# Altium PCB VIrtex_XC7vx690t_2ffg1927i_T_B.PcbDoc (part 1 of 5)
Units mm, origin at the board's own origin, x right, y up, seen from the top; angles counter-clockwise.
Board outline 230 x 148 mm, 12 copper layers (Top Layer 1, GND_IN_Layer, 1_V_IN_layer, 1.2_V_IN_layer, 1.8_V_IN_layer, 3.3_V_IN_layer, IN_Layer 6, IN_Layer 7, IN_Layer 8, IN_Layer 9, IN_Layer 10, Bottom Layer), stack 1.452 mm thick; 73 components, 655 nets, 2765 pads, 42 vias.
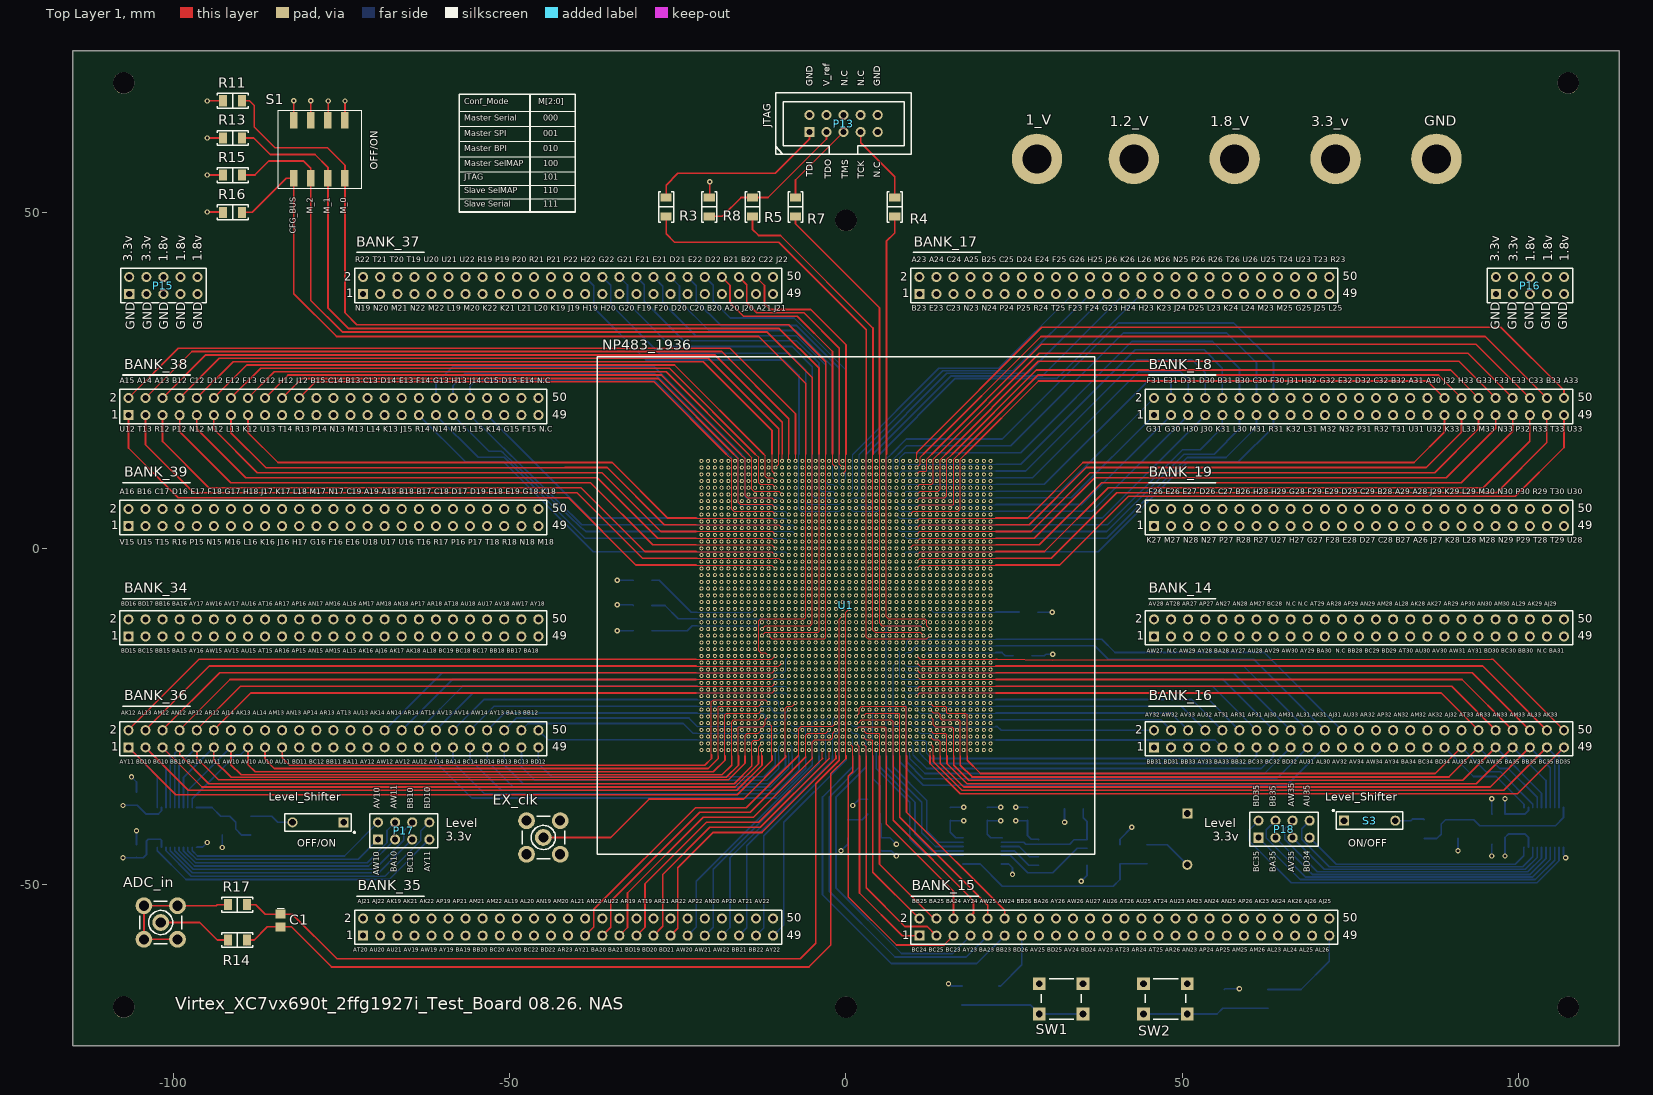
[diagram p0: Top Layer 1 view]
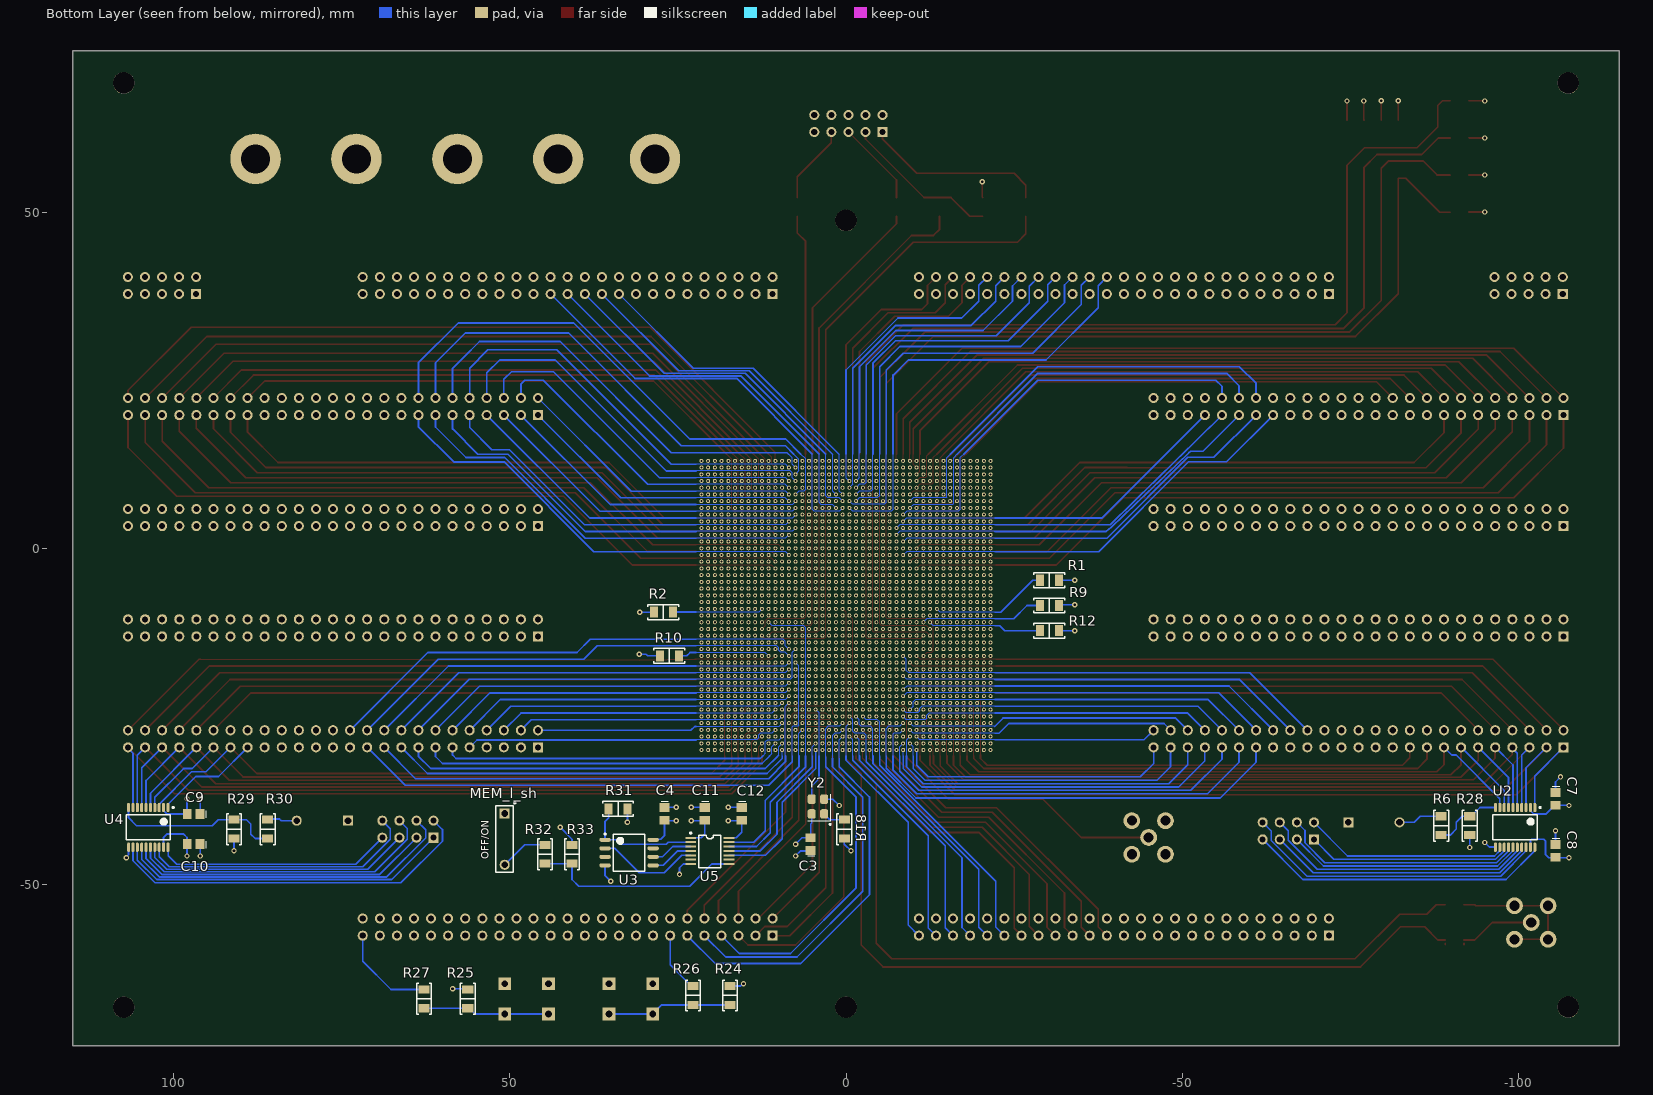
[diagram p1: Bottom Layer view, seen from below]
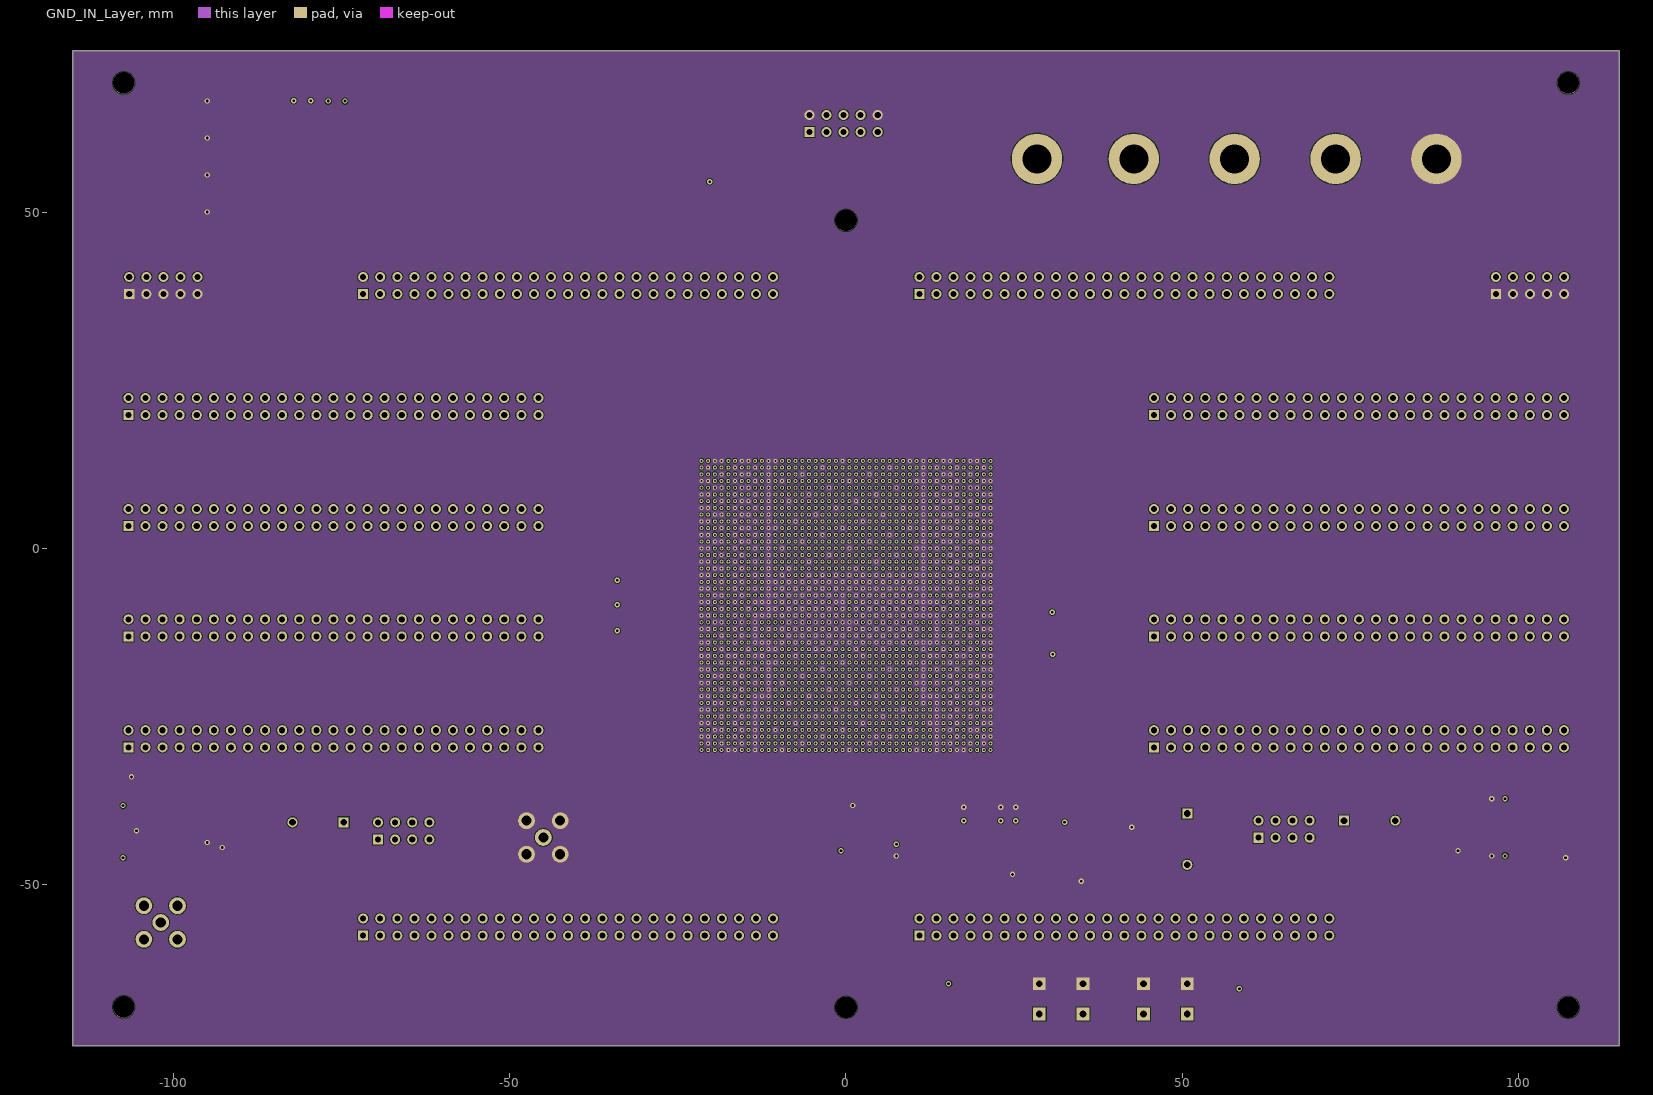
[diagram p2: GND_IN_Layer]
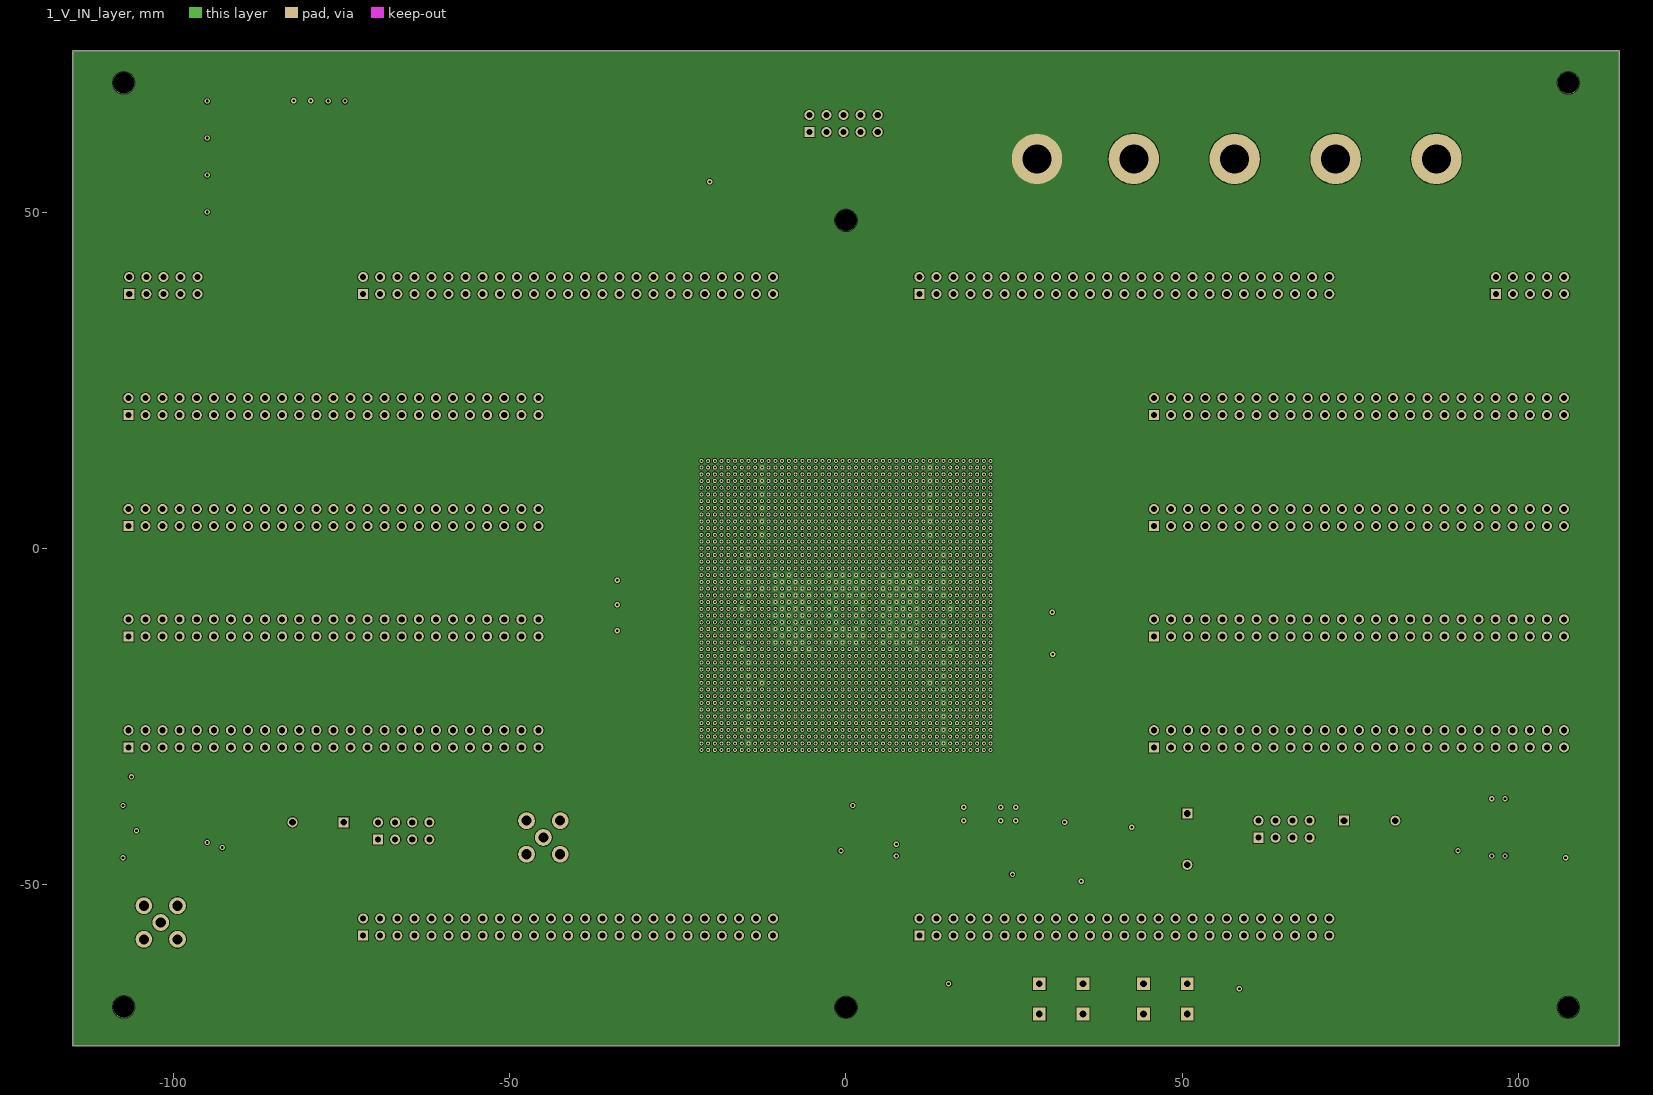
[diagram p3: 1_V_IN_layer]
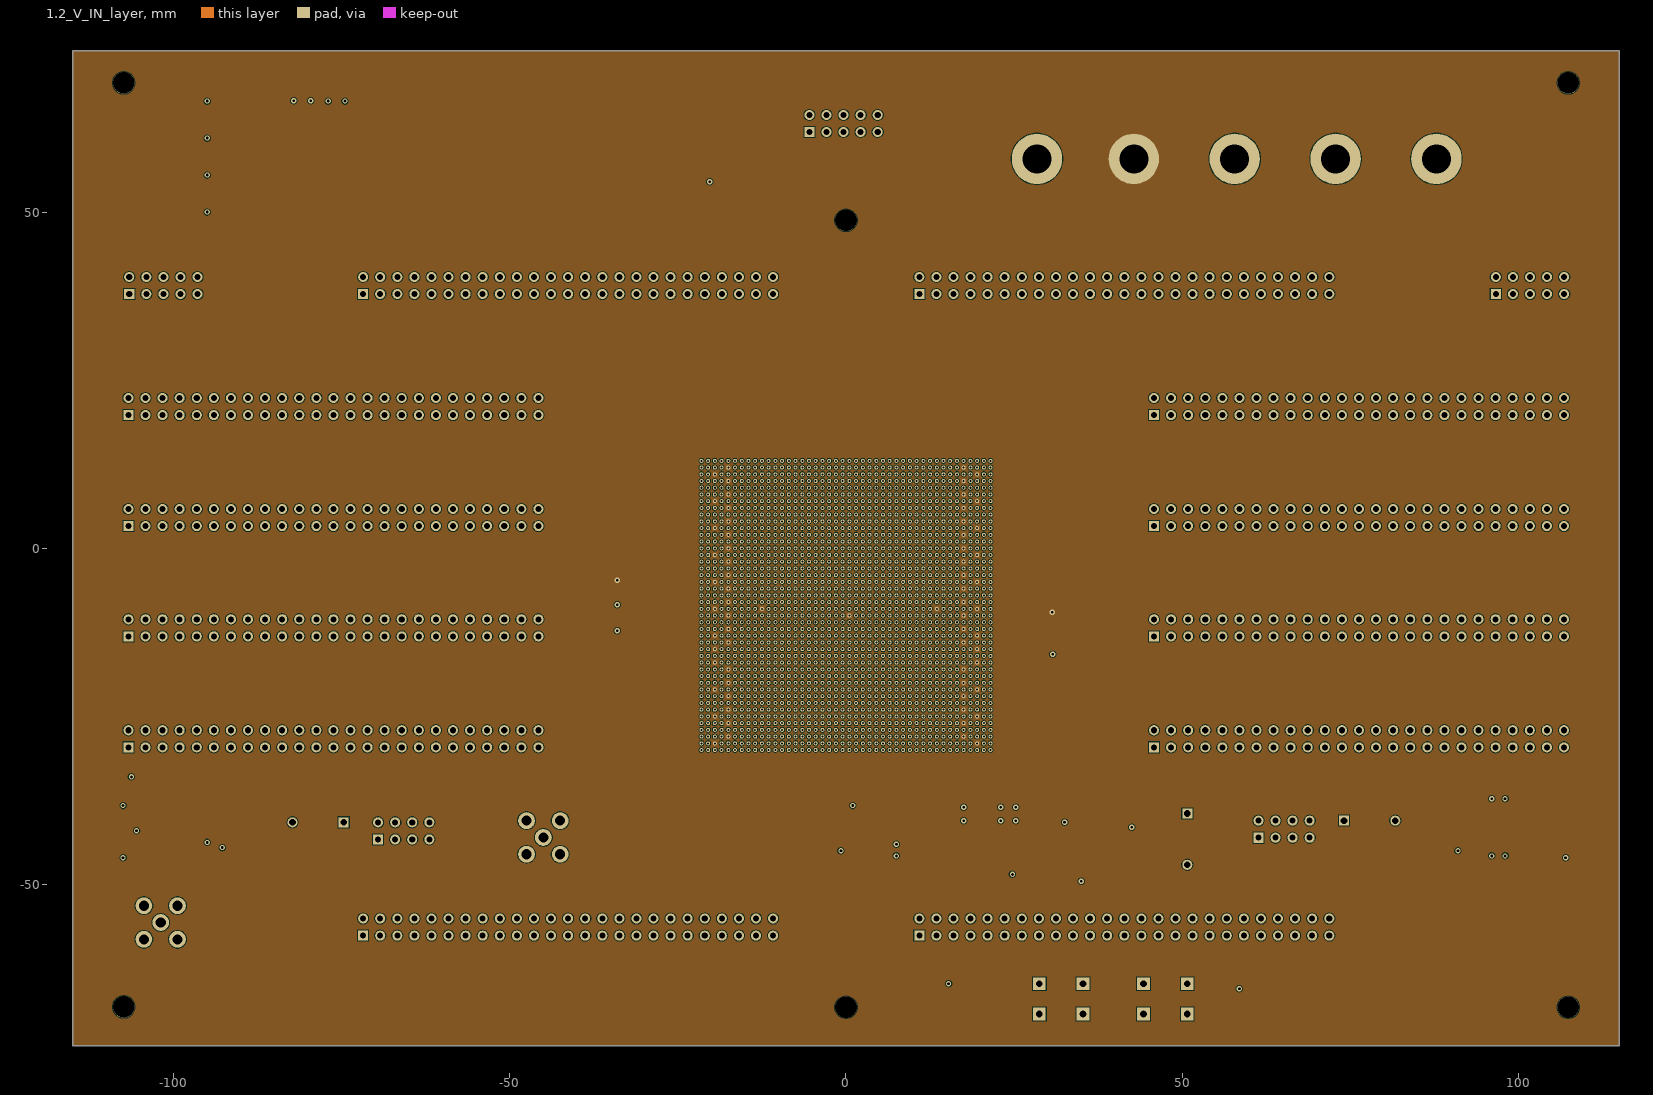
[diagram p4: 1.2_V_IN_layer]
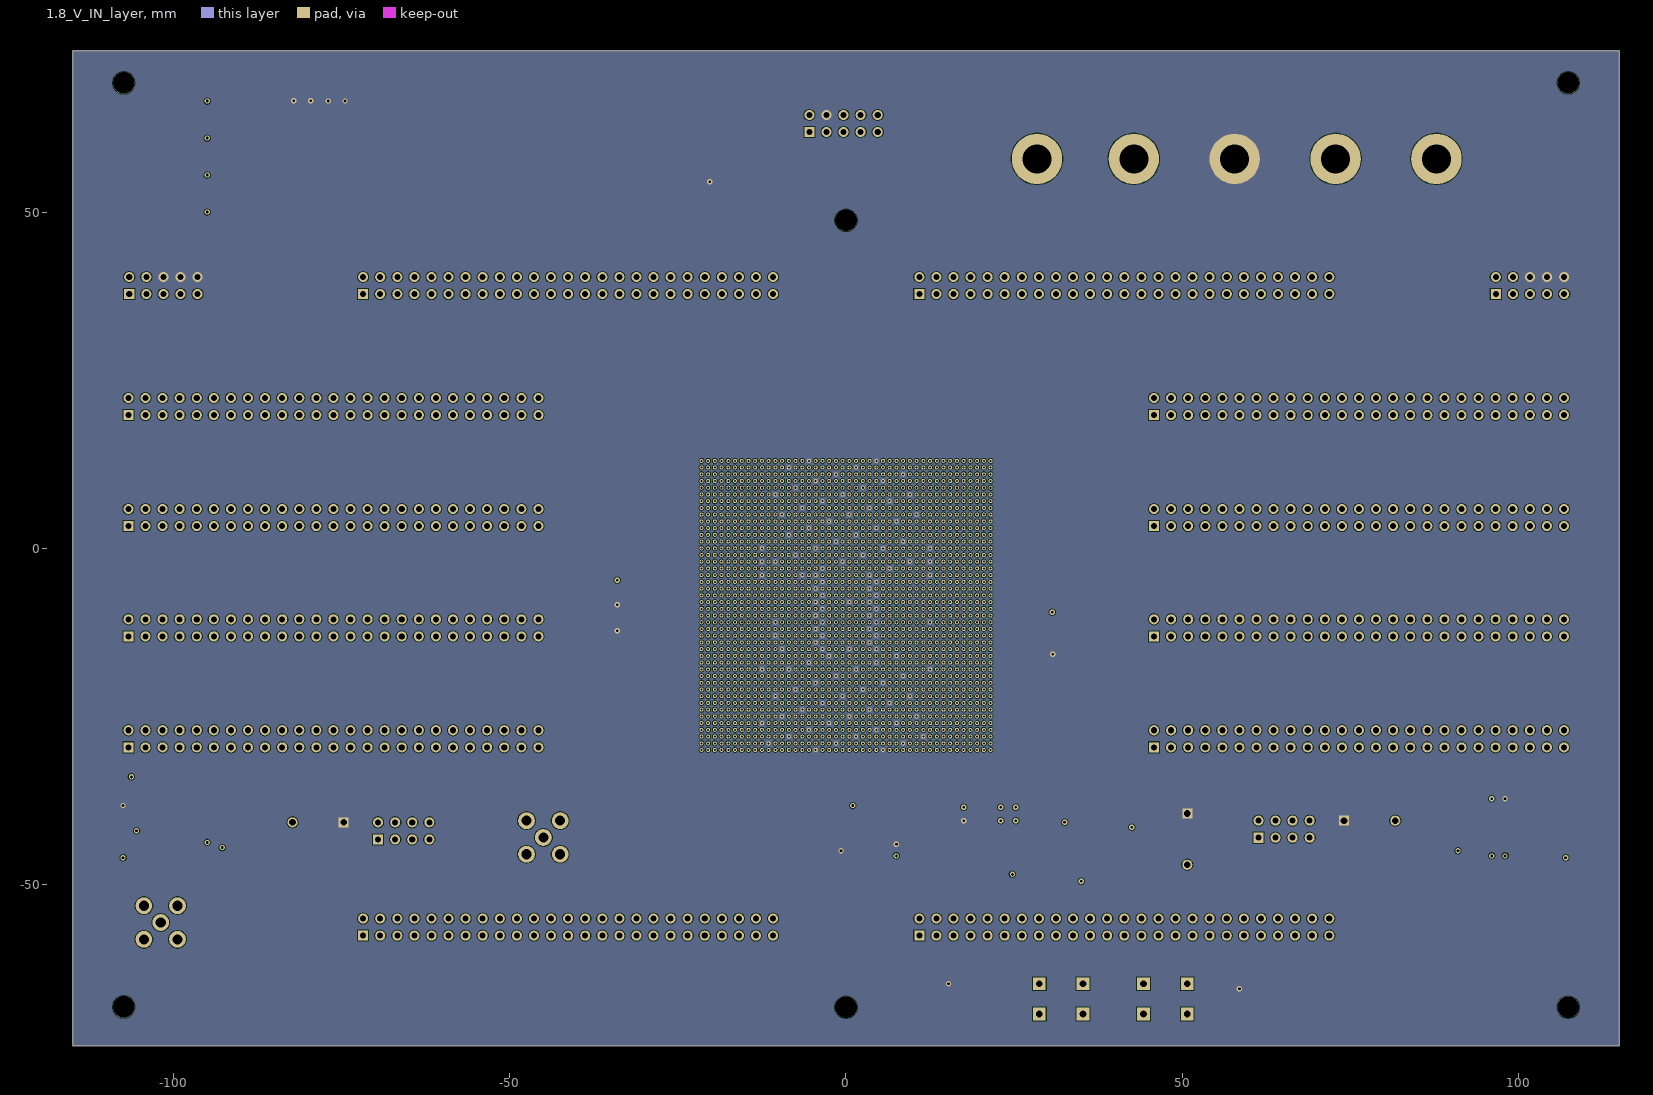
[diagram p5: 1.8_V_IN_layer]
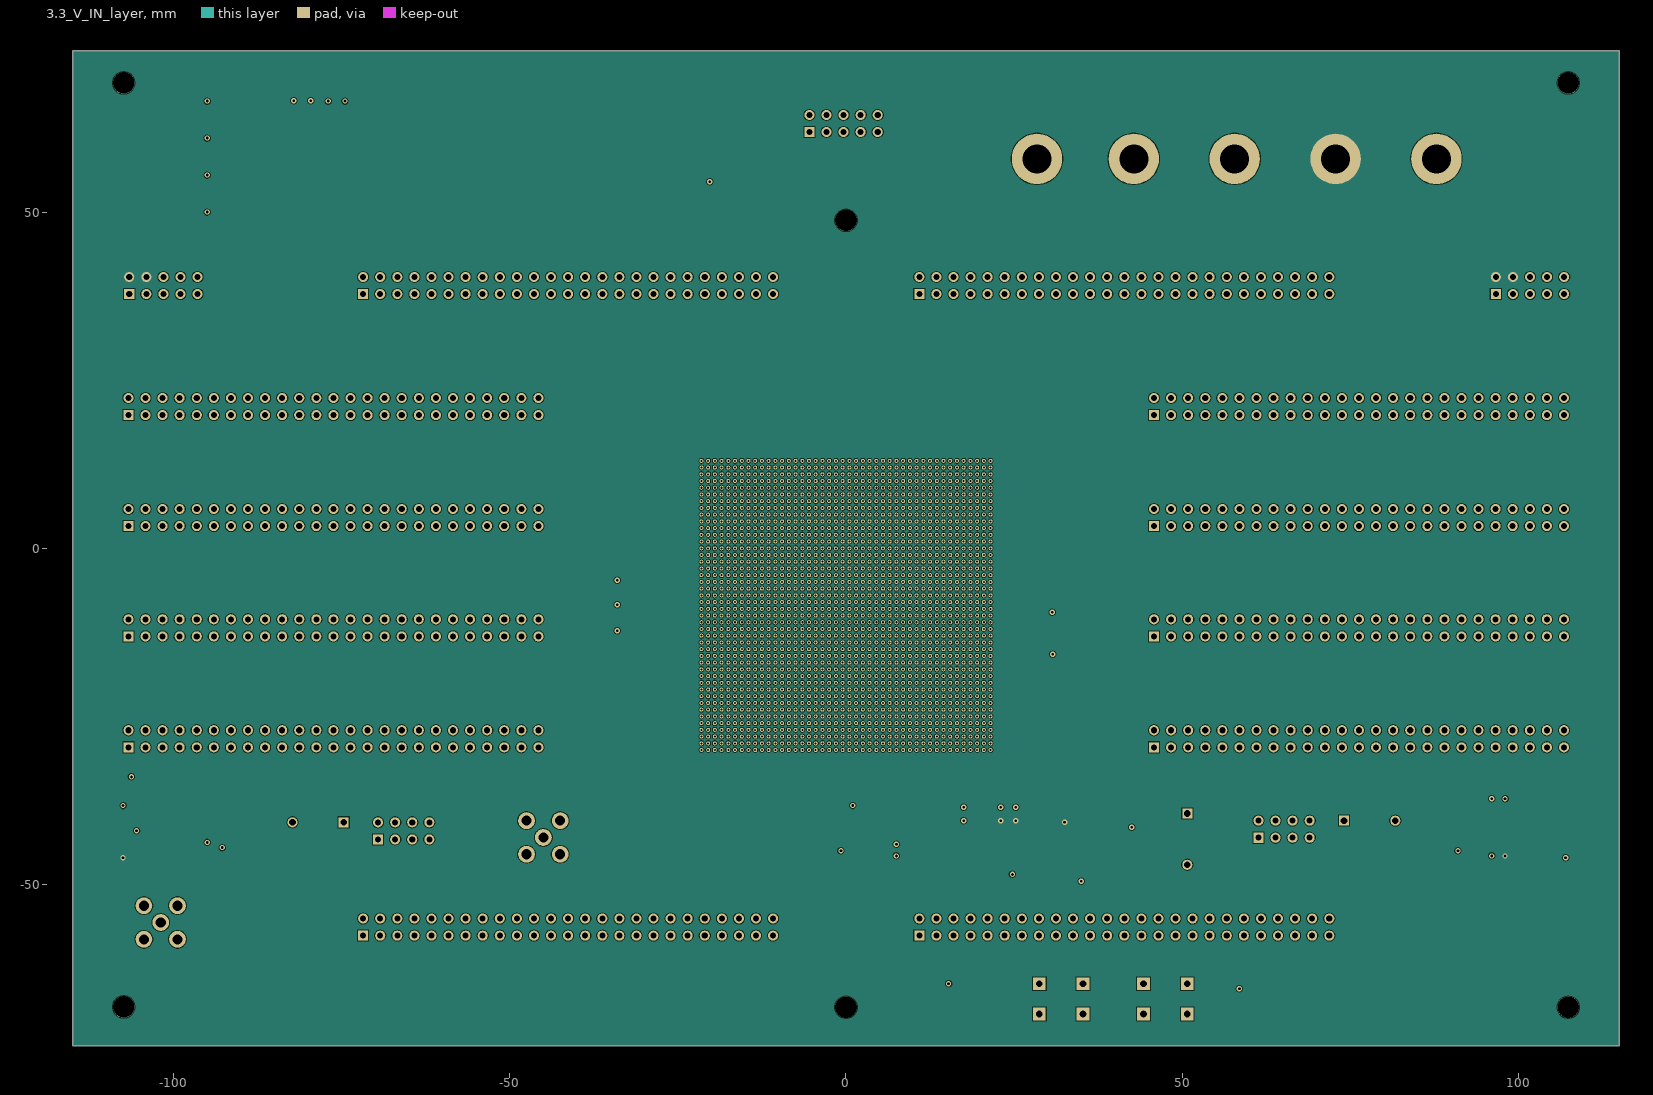
[diagram p6: 3.3_V_IN_layer]
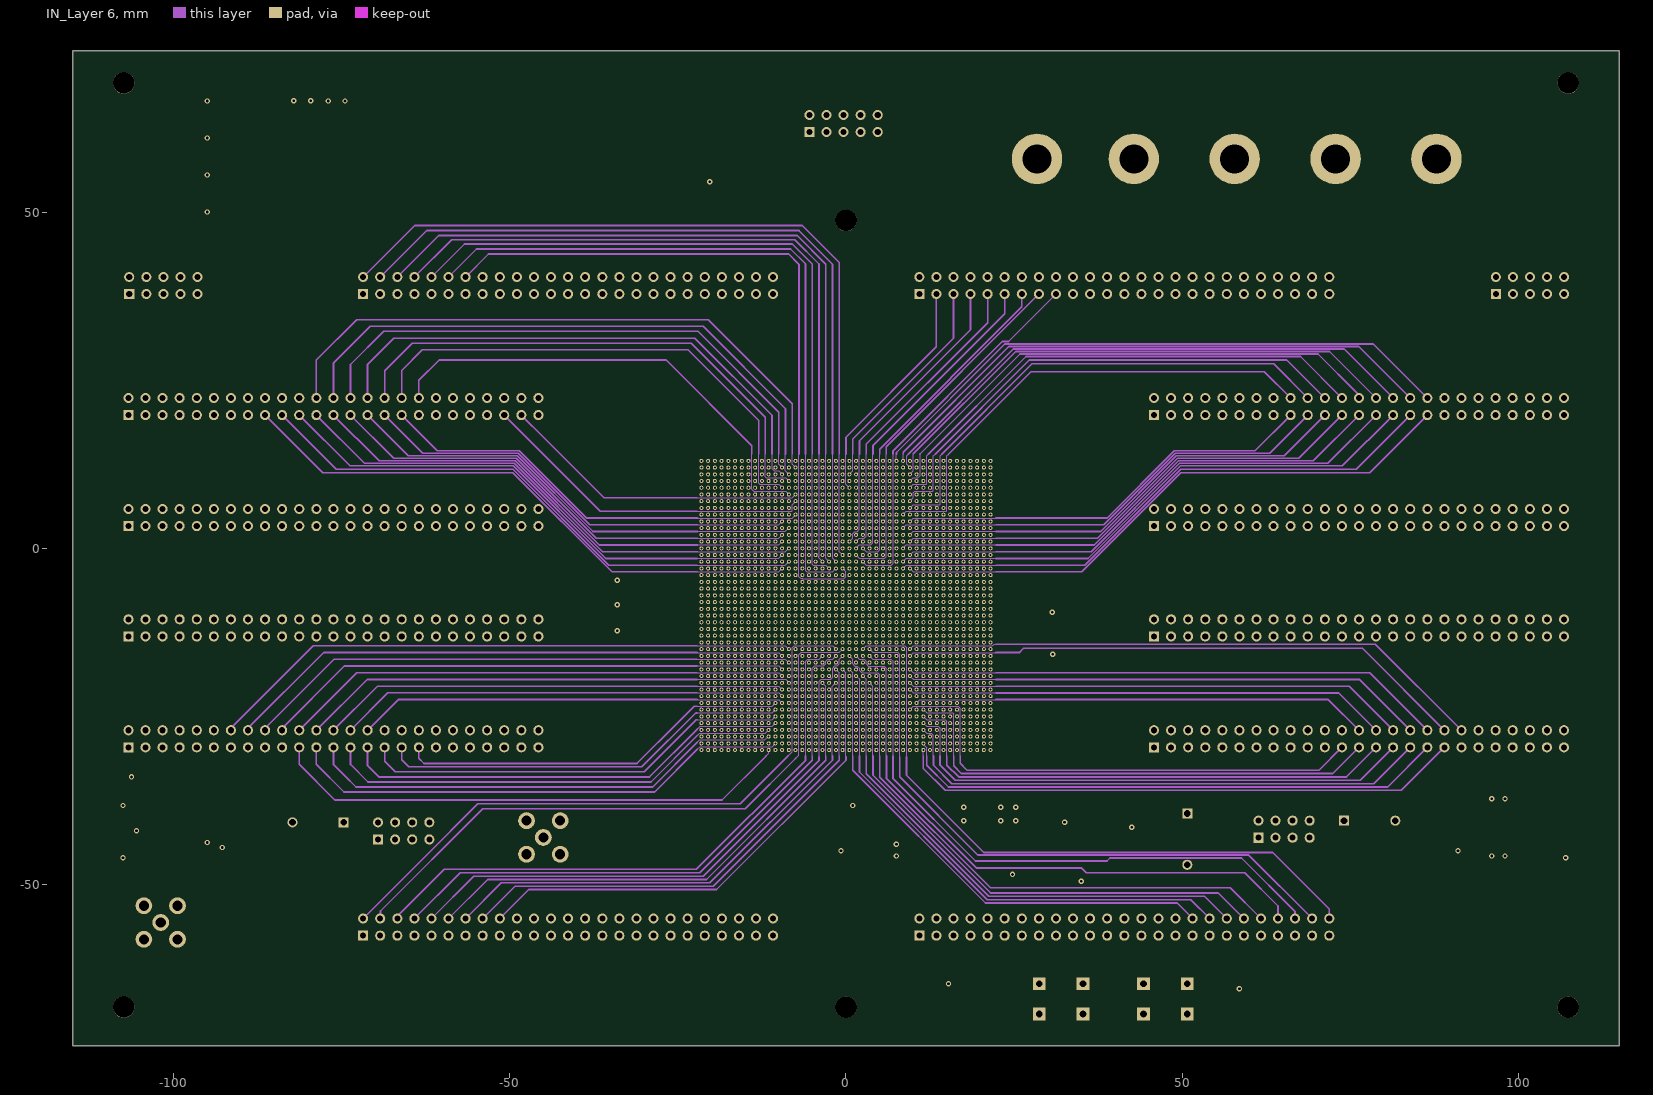
[diagram p7: IN_Layer 6]
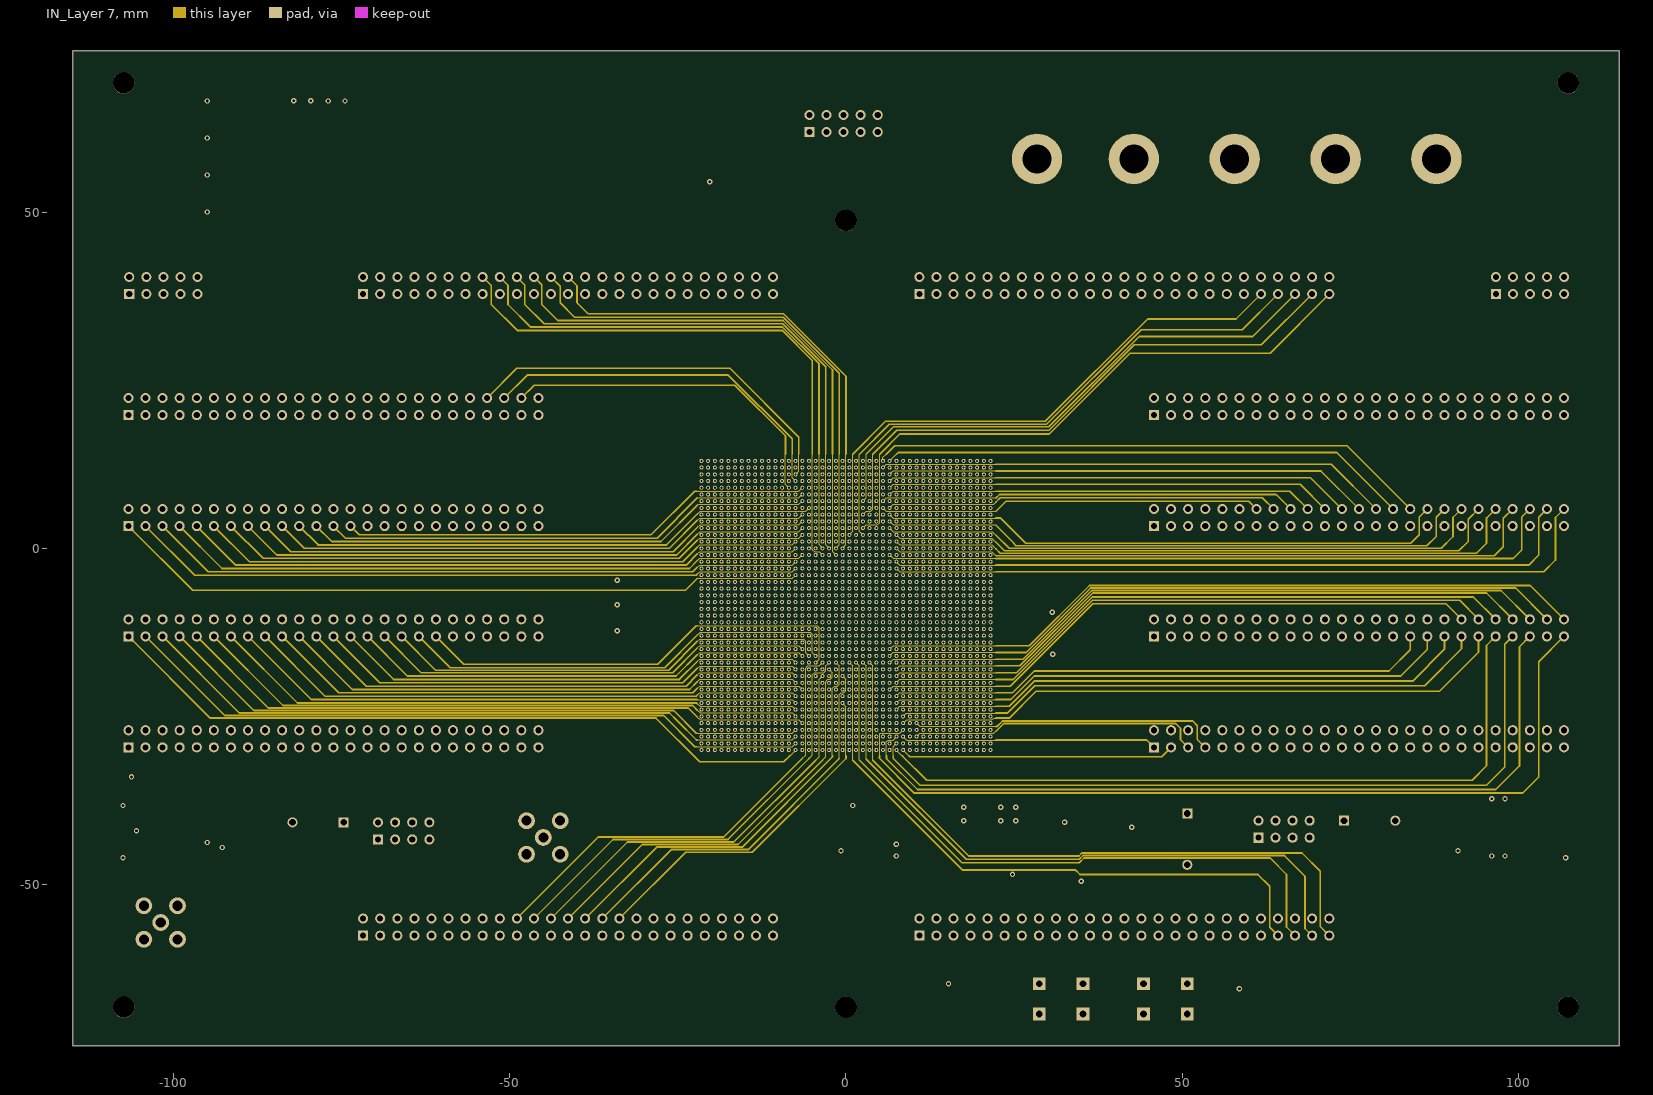
[diagram p8: IN_Layer 7]
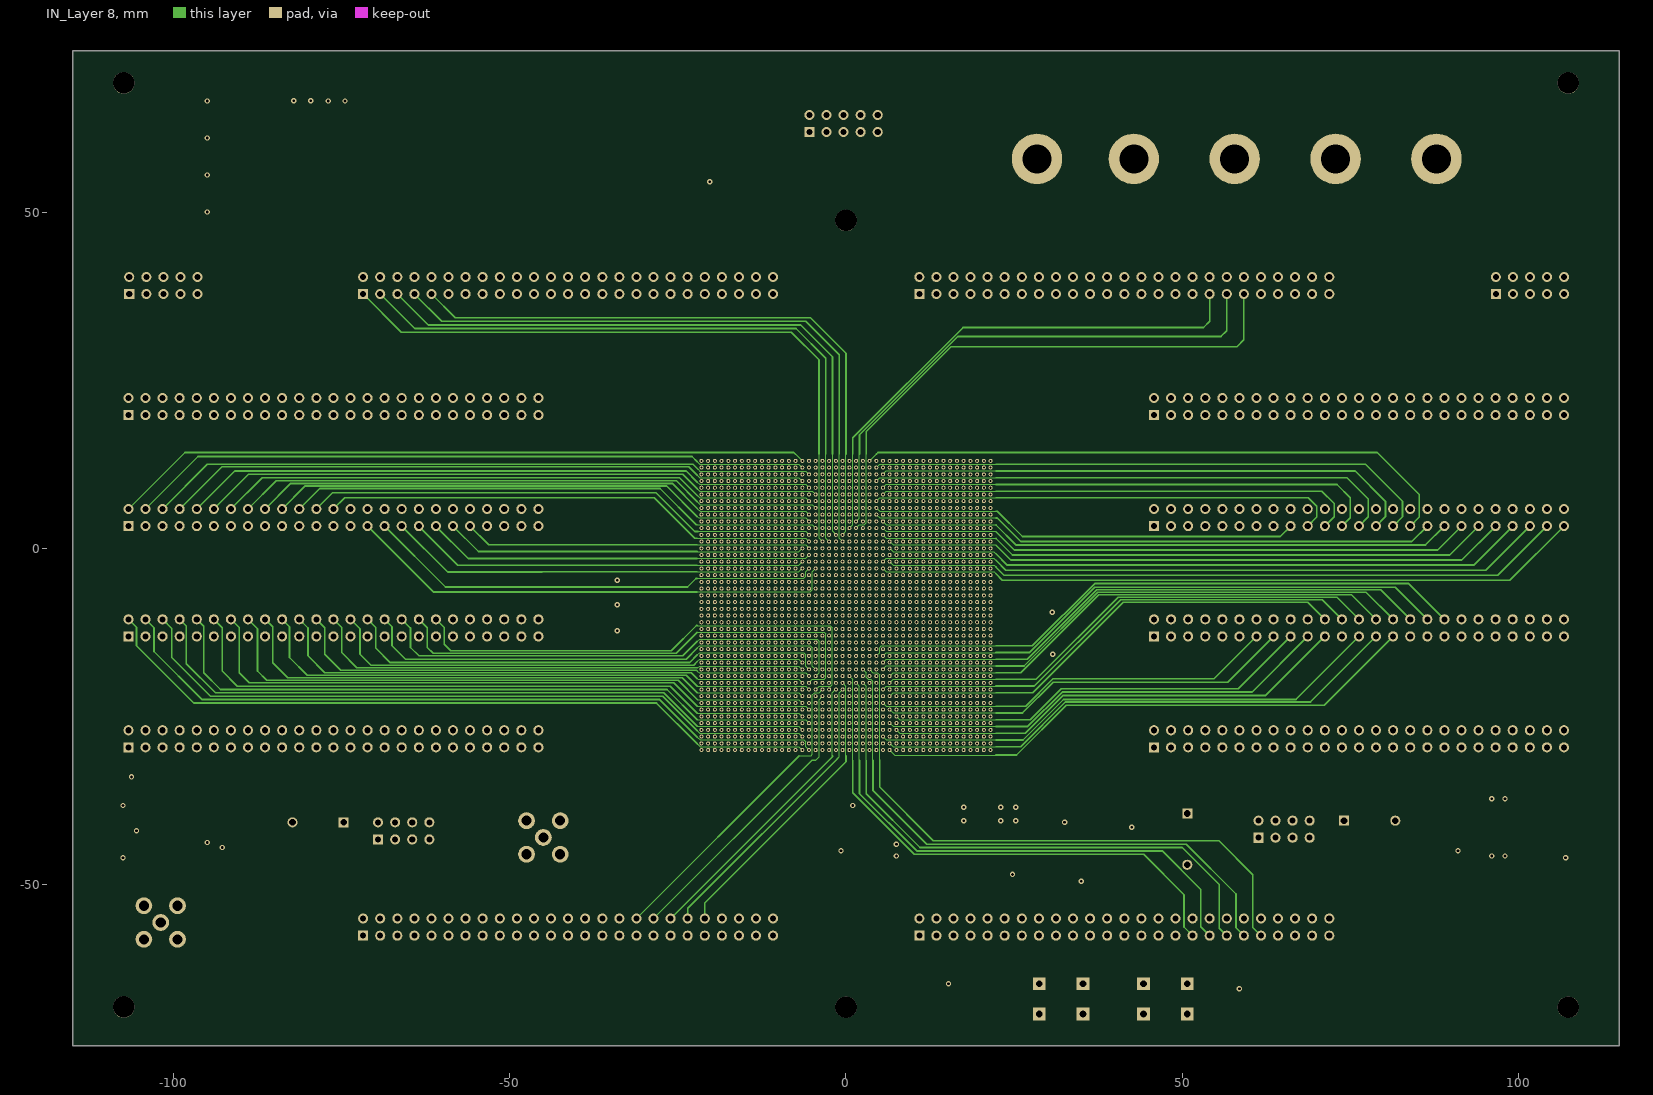
[diagram p9: IN_Layer 8]
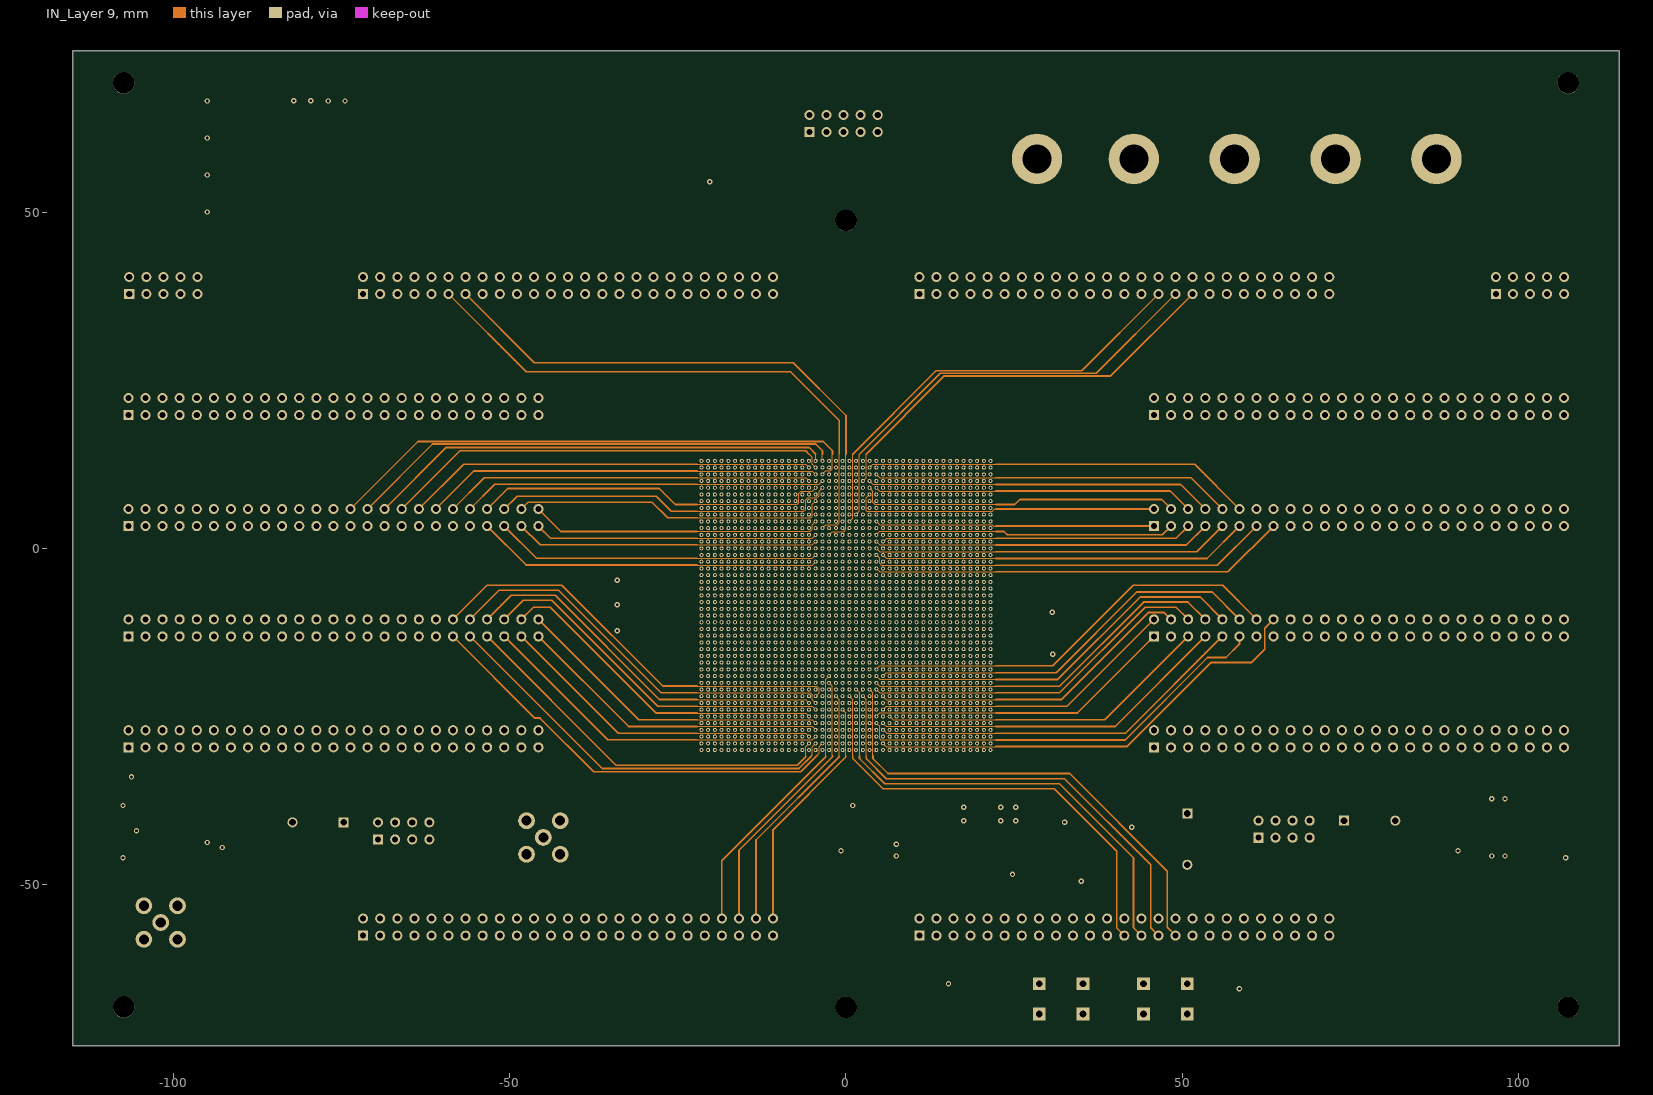
[diagram p10: IN_Layer 9]
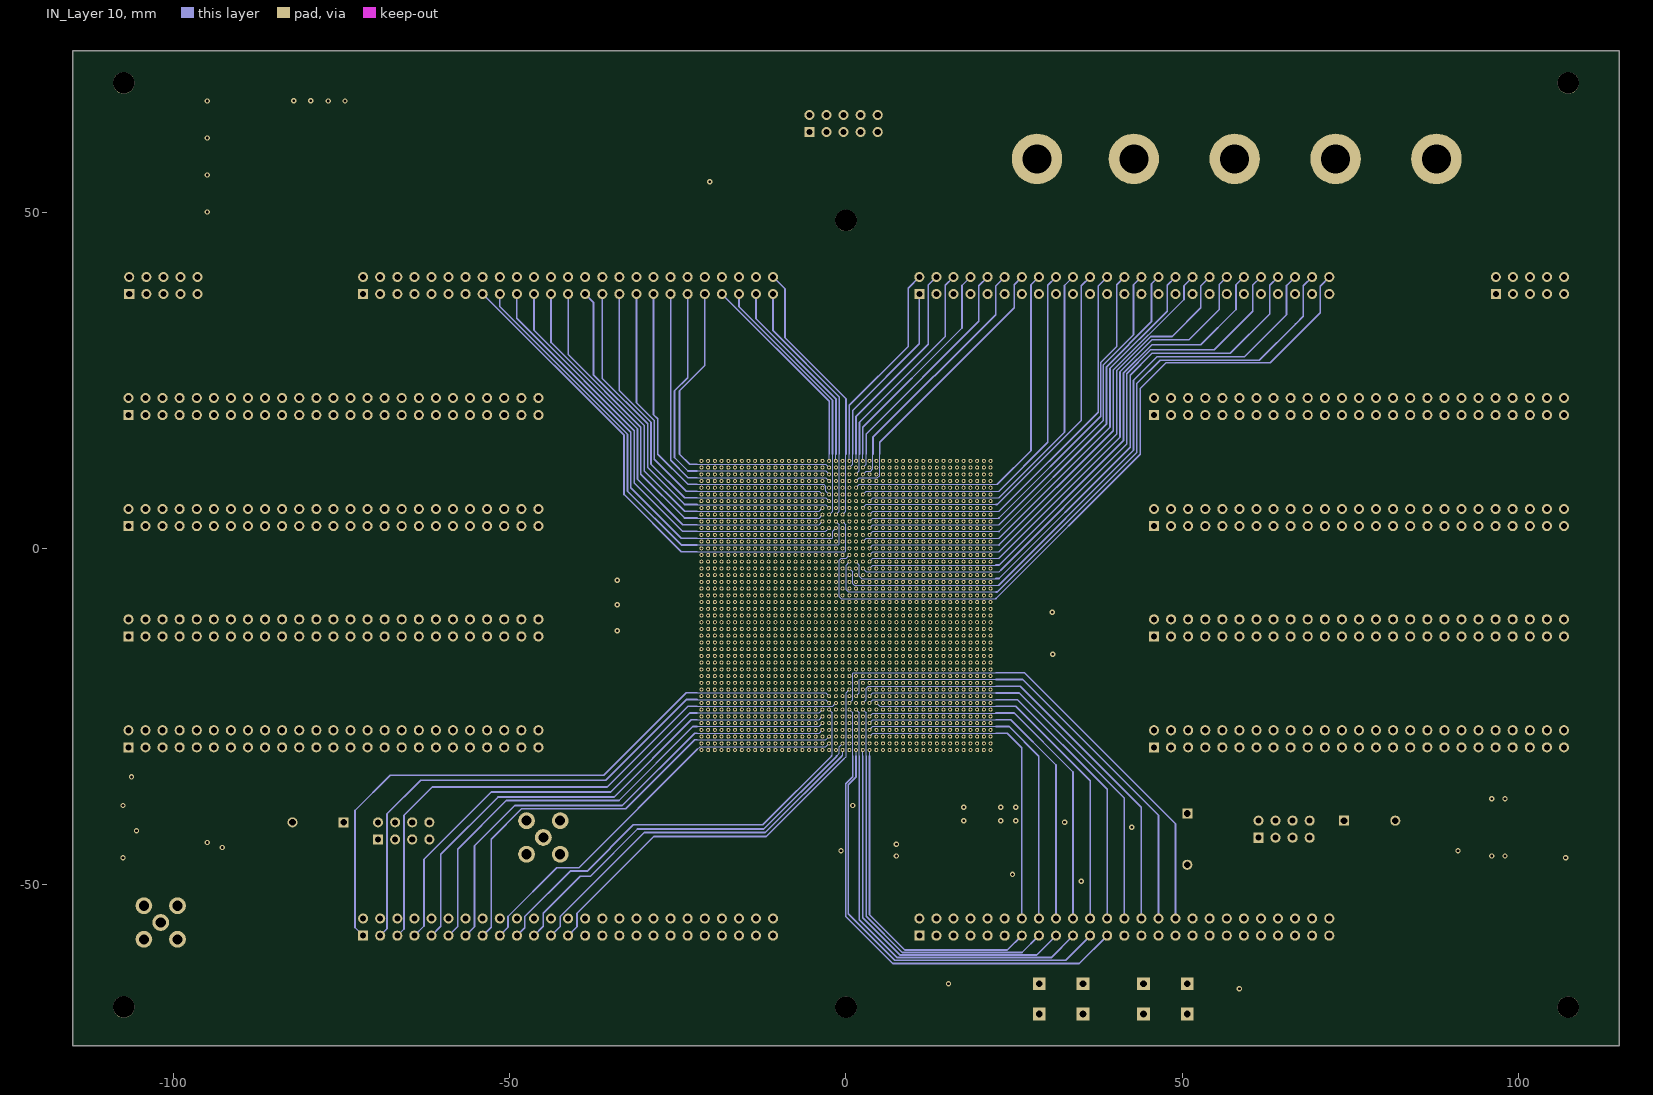
[diagram p11: IN_Layer 10]
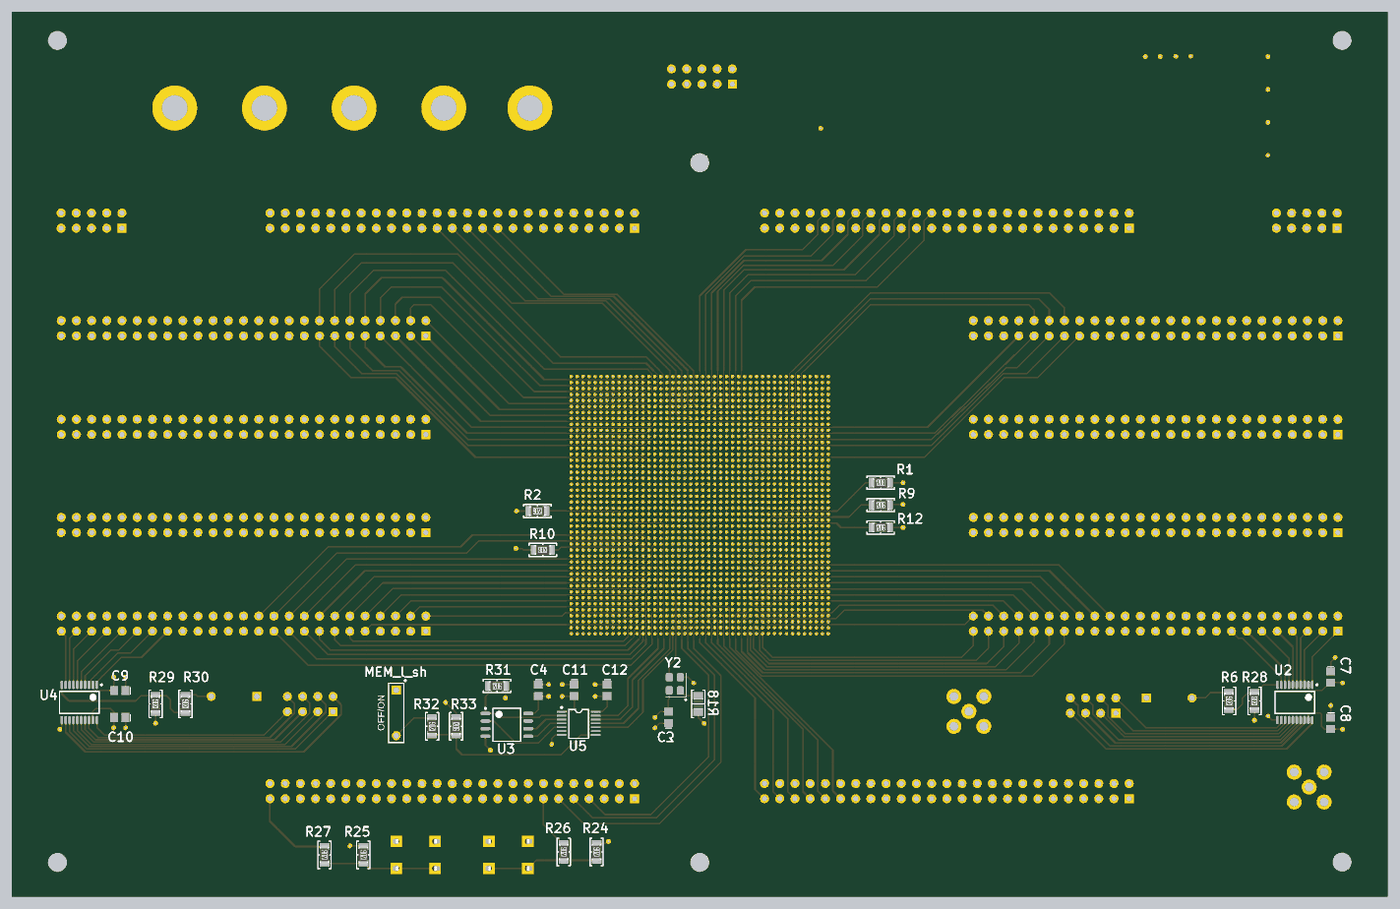
[diagram p16: 3D render of the assembled board from below, using the file's embedded part models]

## Layer stack, top to bottom
Top Solder: solder mask 0.0102, Solder Resist, Dk 3.5
Top Layer 1: signal copper 0.035
Dielectric 2: prepreg 0.0711, PP-006, Dk 4.1
GND_IN_Layer: signal copper 0.035
Dielectric 3: prepreg 0.0711, PP-006, Dk 4.1
1_V_IN_layer: signal copper 0.035
Dielectric 4: prepreg 0.0711, PP-006, Dk 4.1
1.2_V_IN_layer: signal copper 0.035
Dielectric 5: prepreg 0.0711, PP-006, Dk 4.1
1.8_V_IN_layer: signal copper 0.035
Dielectric 6: prepreg 0.0711, PP-006, Dk 4.1
3.3_V_IN_layer: signal copper 0.0356
Dielectric 1: dielectric 0.32, FR-4, Dk 4.8
IN_Layer 6: signal copper 0.0356
Dielectric 7: prepreg 0.0711, PP-006, Dk 4.1
IN_Layer 7: signal copper 0.035
Dielectric 8: prepreg 0.0711, PP-006, Dk 4.1
IN_Layer 8: signal copper 0.035
Dielectric 9: prepreg 0.0711, PP-006, Dk 4.1
IN_Layer 9: signal copper 0.035
Dielectric 10: prepreg 0.0711, PP-006, Dk 4.1
IN_Layer 10: signal copper 0.035
Dielectric 11: prepreg 0.0711, PP-006, Dk 4.1
Bottom Layer: signal copper 0.035
Bottom Solder: solder mask 0.0102, Solder Resist, Dk 3.5

## Board outline
-115,-74 -115,74 115,74 115,-74

## Design rules (kind name [scope] priority, off if disabled: settings)
Clearance Clearance_1 [All] p1: gap=0.12 ignorepadtopadclearanceinfootprint=FALSE
Clearance [WithinRoom('NP483_1936_Area')] p2: gap=0.07 ignorepadtopadclearanceinfootprint=FALSE
FanoutControl Fanout_Default [All] p5: bgadir=Out bgaviamode=Closest fanoutstyle=Auto fanoutdirection=Alternating viagrid=0.025 // Fanout_Default (Default Rule)
HoleSize [All] p1: absolutevalues=TRUE maxlimit=5.54 minlimit=0.025 maxpercent=80.000 minpercent=20.000
MinimumSolderMaskSliver [All] p1: minsoldermaskwidth=0.12
PolygonConnect [All] p1: connectstyle=Direct reliefconductorwidth=0.254 reliefentries=4 polygonreliefangle="90 Angle" airgapwidth=0.254
RoomDefinition NP483_1936_Area [False vs False] p1: confinementstyle=ConfineIn formatcopy=TRUE lockcomponents=FALSE outline -22.1,14 22.3,14 22.3,-30.9 -22.1,-30.9
RoutingVias RoutingVias_1 [All] p1: holewidth=0.711 width=1.27 viastyle="Through Hole" minholewidth=0.4 minwidth=0.8 maxholewidth=3.6 maxwidth=3.6
SilkToSolderMaskClearance [IsPad] p1: minsilkscreentomaskgap=0.1 clearancetoexposedcopper=TRUE
SolderMaskExpansion [All] p1: expansion=0.025 istentingtop=FALSE
Width Width_1 [All] p1: maxlimit=0.254 minlimit=0.14 preferedwidth=0.254 minimp=50.000000 maximp=50.000000 favimp=50.000000
Width [WithinRoom('NP483_1936_Area')] p2: maxlimit=0.14 minlimit=0.14 preferedwidth=0.14 minimp=50.000000 maximp=50.000000 favimp=50.000000
26 further rules are at their usual default settings.

## Classes and differential pairs
net class l_sh_B[9..16]: l_sh_B9 l_sh_B10 l_sh_B11 l_sh_B12 l_sh_B13 l_sh_B14 l_sh_B15 l_sh_B16
net class B[1..8]: B1 B2 B3 B4 B5 B6 B7 B8
component class Power: B_J_conn1 B_J_conn2 B_J_conn3 B_J_conn4 B_J_conn5
component class JTAG_Conf_Pin: ADC_in C1 C3 C4 e P13 R3 R4 R5 R7 R8 R9 R10 R11 R12 R13 R15 R16 R17 R18 S1
component class I_O_Bank: BANK_18 P1 P2 P3 P4 P6 P7 P8 P9 P10 P11 P12 U1
component class GTX_GTH: R1 R2

## Components (designator, comment, footprint, x,y, rotation, side; value= is the part's Value field where it differs from the comment)
1.2_V "Banana_Jack" Banana_Jack_4.3_M4 42.8,57.9 r90 top locked (schematic designator B_J_conn2)
1.8_V "Banana_Jack" Banana_Jack_4.3_M4 57.8,57.9 r90 top locked (schematic designator B_J_conn3)
1_V "Banana_Jack" Banana_Jack_4.3_M4 28.4,57.9 r90 top locked (schematic designator B_J_conn1)
3.3_v "Banana_Jack" Banana_Jack_4.3_M4 72.8,57.9 r90 top locked (schematic designator B_J_conn4)
ADC_in "SMB" SMB_V-RJ45 -101.9,-55.65 r180 top locked (schematic designator P14)
BANK_14 "Header 25X2" HDR2X25 45.8,-13.1 r0 top locked (schematic designator P1)
BANK_15 "Header 25X2" HDR2X25 10.9,-57.6 r0 top (schematic designator P2)
BANK_16 "Header 25X2" HDR2X25 45.8,-29.6 r0 top locked (schematic designator P3)
BANK_17 "Header 25X2" HDR2X25 10.9,37.8 r0 top (schematic designator P4)
BANK_18 "Header 25X2" HDR2X25 45.8,19.8 r0 top locked (schematic designator P5)
BANK_19 "Header 25X2" HDR2X25 45.8,3.3 r0 top locked (schematic designator P6)
BANK_34 "Header 25X2" HDR2X25 -106.7,-13.1 r0 top locked (schematic designator P7)
BANK_35 "Header 25X2" HDR2X25 -71.8,-57.6 r0 top (schematic designator P8)
BANK_36 "Header 25X2" HDR2X25 -106.7,-29.6 r0 top locked (schematic designator P9)
BANK_37 "Header 25X2" HDR2X25 -71.8,37.8 r0 top (schematic designator P10)
BANK_38 "Header 25X2" HDR2X25 -106.7,19.8 r0 top locked (schematic designator P11)
BANK_39 "Header 25X2" HDR2X25 -106.7,3.3 r0 top locked (schematic designator P12)
C1 "SMD_Capasitor" C0805 -84.1,-55.35 r270 top locked value=1000pF
C3 "SMD_Capasitor" C0805 5.25,-44 r90 bottom value=0.1uF
C4 "SMD_Capasitor" C0805 27,-39.5 r270 bottom value=0.1uf
C7 "SMD_Capasitor" C0805 -105.5,-37.25 r270 bottom value=0.1uF
C8 "SMD_Capasitor" C0805 -105.5,-45 r270 bottom value=0.1uf
C9 "SMD_Capasitor" C0805 97,-39.5 r0 bottom value=0.1uF
C10 "SMD_Capasitor" C0805 97,-44 r0 bottom value=0.1uF
C11 "SMD_Capasitor" C0805 21,-39.5 r270 bottom value=0.1uF
C12 "SMD_Capasitor" C0805 15.5,-39.5 r270 bottom value=0.1uF
EX_clk "SMB" SMB_V-RJ45 -45,-43 r0 top (schematic designator P19)
GND "Banana_Jack" Banana_Jack_4.3_M4 87.8,57.9 r90 top locked (schematic designator B_J_conn5)
Level_Shifter "SW DIP-1" SW_DIP-1 -78.5,-40.75 r180 top (schematic designator S2)
MEM_l_sh "SW DIP-1" SW_DIP-1 50.75,-43.25 r270 bottom (schematic designator S4)
P13 "JTAG_CONN" JTAG_CONN_pin10_5X2 -0.362,63.162 r0 top locked
P15 "Header 5X2" HDR2X5 -106.58,37.8 r0 top
P16 "Header 5X2" HDR2X5 96.63,37.8 r0 top
P17 "Header 4X2" HDR2X4 -69.58,-43.29 r0 top
P18 "Header 4X2" HDR2X4 61.33,-43.04 r0 top
R1 "SMD_Resisor" "RES 1206_3216" -30.25,-4.75 r180 bottom value=1K
R2 "SMD_Resisor" "RES 1206_3216" 27.15,-9.5 r0 bottom value=1K
R3 "SMD_Resisor" "RES 1206_3216" -26.75,50.75 r90 top value=100
R4 "SMD_Resisor" "RES 1206_3216" 7.25,50.75 r270 top value=100
R5 "SMD_Resisor" "RES 1206_3216" -13.917,50.75 r90 top value=100
R6 "SMD_Resisor" "RES 1206_3216" -88.5,-41.25 r90 bottom value=100
R7 "SMD_Resisor" "RES 1206_3216" -7.5,50.75 r90 top value=100
R8 "SMD_Resisor" "RES 1206_3216" -20.333,50.75 r270 top value=4.7K
R9 "SMD_Resisor" "RES 1206_3216" -30.25,-8.5 r180 bottom value=330
R10 "SMD_Resisor" "RES 1206_3216" 26.25,-16 r0 bottom value=4.7k
R11 "SMD_Resisor" "RES 1206_3216" -91.21,66.545 r0 top value=1.2K
R12 "SMD_Resisor" "RES 1206_3216" -30.25,-12.25 r180 bottom value=4.7k
R13 "SMD_Resisor" "RES 1206_3216" -91.21,61.012 r0 top value=1.2K
R14 "SMD_Resisor" "RES 1206_3216" -90.5,-58.25 r180 top locked value=100
R15 "SMD_Resisor" "RES 1206_3216" -91.21,55.478 r0 top value=1.2K
R16 "SMD_Resisor" "RES 1206_3216" -91.21,49.945 r0 top value=1.2K
R17 "SMD_Resisor" "RES 1206_3216" -90.5,-53 r180 top locked value=100
R18 "SMD_Resisor" "RES 1206_3216" 0.25,-41.75 r90 bottom value=1K
R24 "SMD_Resisor" "RES 1206_3216" 17.25,-66.5 r90 bottom value=10K
R25 "SMD_Resisor" "RES 1206_3216" 56.25,-67 r90 bottom value=10K
R26 "SMD_Resisor" "RES 1206_3216" 22.75,-66.5 r90 bottom value=100
R27 "SMD_Resisor" "RES 1206_3216" 62.75,-67 r90 bottom value=100
R28 "SMD_Resisor" "RES 1206_3216" -92.75,-41.25 r90 bottom value=4.7K
R29 "SMD_Resisor" "RES 1206_3216" 91,-41.75 r90 bottom value=4.7K
R30 "SMD_Resisor" "RES 1206_3216" 86,-41.75 r90 bottom value=100
R31 "SMD_Resisor" "RES 1206_3216" 33.9,-38.75 r180 bottom value=2.4K
R32 "SMD_Resisor" "RES 1206_3216" 44.75,-45.5 r90 bottom value=100
R33 "SMD_Resisor" "RES 1206_3216" 40.75,-45.5 r270 bottom value=4.7K
S1 "SW DIP-4" SW_DIP_SPSTx04_Slide -78.31,59.345 r90 top
S3 "SW DIP-1" SW_DIP-1 77.87,-40.5 r0 top
SW1 "Button" "SWITCH TACTILE" 32,-67 r270 top
SW2 "Button" "SWITCH TACTILE" 47.5,-67 r270 top
U1 "XC7VX690T-2FFG1927I" NP483_1936_for_2ffg1927 0,-8.5 r0 top locked
U2 "TXB0108PWR" TXB0108PWR -99.5,-41.5 r270 bottom
U3 "S25Fl127" S25Fl127_SOIC_8 32.25,-45.25 r180 bottom
U4 "TXB0108PWR" TXB0108PWR 103.75,-41.5 r270 bottom
U5 "TXB0104PWR" TXB0104PWR 20.25,-45 r270 bottom
Y2 "Oscillator 100Mhz" Oscillator_SMD_SiT_PQFN-4Pin_3.2x2.5mm 4.174,-38.4 r90 bottom

## Footprints (in the part's own frame and the unit in brackets; to place one, negate y for a bottom-side part, rotate by r counter-clockwise, add the part's x,y. Pads: shape width x height; smd on the part's side, far side on the other; paste and mask are expansions set on the pad)
Banana_Jack_4.3_M4 [mm]
  round 7.5 hole 4.3: 1(0,0)
C0805 [mm] "Chip Capacitor; Body 2.0 x 1.2 mm (LxW typ)"
  rect 1.3x1.5 smd: 1(-0.95,0) 2(0.95,0)
  silkscreen extent -1.81,-0.47 -1.8,0.6
HDR2X4 [mm] "Connector; Header; 4x2 Position"
  rect 1.5x1.5 hole 0.9: 1(0,0)
  round 1.5 hole 0.9: 2(0,2.54) 3(2.54,0) 4(2.54,2.54) 5(5.08,0) 6(5.08,2.54) 7(7.62,0) 8(7.62,2.54)
  silkscreen extent -1.27,-1.27 8.89,3.81
HDR2X5 [mm] "Connector; Header; 5x2 Position"
  rect 1.5x1.5 hole 0.9: 1(0,0)
  round 1.5 hole 0.9: 2(0,2.54) 3(2.54,0) 4(2.54,2.54) 5(5.08,0) 6(5.08,2.54) 7(7.62,0) 8(7.62,2.54) 9(10.16,0) 10(10.16,2.54)
  silkscreen extent -1.27,-1.27 11.43,3.81
HDR2X25 [mm] "Connector; Header; 25x2 Position"
  rect 1.5x1.5 hole 0.9: 1(0,0)
  round 1.5 hole 0.9: 2(0,2.54) 3(2.54,0) 4(2.54,2.54) 5(5.08,0) 6(5.08,2.54) 7(7.62,0) 8(7.62,2.54) 9(10.16,0) 10(10.16,2.54) 11(12.7,0) 12(12.7,2.54) 13(15.24,0) 14(15.24,2.54) 15(17.78,0) 16(17.78,2.54) 17(20.32,0) 18(20.32,2.54) 19(22.86,0) 20(22.86,2.54) 21(25.4,0) 22(25.4,2.54) 23(27.94,0) 24(27.94,2.54) 25(30.48,0) 26(30.48,2.54) 27(33.02,0) 28(33.02,2.54) 29(35.56,0) 30(35.56,2.54) 31(38.1,0) 32(38.1,2.54) 33(40.64,0) 34(40.64,2.54) 35(43.18,0) 36(43.18,2.54) 37(45.72,0) 38(45.72,2.54) 39(48.26,0) 40(48.26,2.54) 41(50.8,0) 42(50.8,2.54) 43(53.34,0) 44(53.34,2.54) 45(55.88,0) 46(55.88,2.54) 47(58.42,0) 48(58.42,2.54) 49(60.96,0) 50(60.96,2.54)
  silkscreen extent -1.27,-1.27 62.23,3.81
JTAG_CONN_pin10_5X2 [mm] "Connector; Header; 5x2 Position"
  rect 1.5x1.5 hole 0.9: 1(-5.08,-1.27)
  round 1.5 hole 0.9: 2(-5.08,1.27) 3(-2.54,-1.27) 4(-2.54,1.27) 5(0,-1.27) 6(0,1.27) 7(2.54,-1.27) 8(2.54,1.27) 9(5.08,-1.27) 10(5.08,1.27)
  silkscreen extent -10.1,-4.6 10.1,4.6
NP483_1936_for_2ffg1927 [mm]
  round 0.6 hole 0.3 mask+0.05: *(-21.5,-21.5) *(-21.5,-20.5) *(-21.5,20.5) *(-21.5,21.5) *(-20.5,-21.5) *(-20.5,21.5) *(20.5,-21.5) *(20.5,21.5) *(21.5,-21.5) *(21.5,-20.5) *(21.5,20.5) *(21.5,21.5) A3(-19.5,21.5) A4(-18.5,21.5) A5(-17.5,21.5) A6(-16.5,21.5) A7(-15.5,21.5) A8(-14.5,21.5) A9(-13.5,21.5) A10(-12.5,21.5) A11(-11.5,21.5) A12(-10.5,21.5) A13(-9.5,21.5) A14(-8.5,21.5) A15(-7.5,21.5) A16(-6.5,21.5) A17(-5.5,21.5) A18(-4.5,21.5) A19(-3.5,21.5) A20(-2.5,21.5) A21(-1.5,21.5) A22(-0.5,21.5) A23(0.5,21.5) A24(1.5,21.5) A25(2.5,21.5) A26(3.5,21.5) A27(4.5,21.5) A28(5.5,21.5) A29(6.5,21.5) A30(7.5,21.5) A31(8.5,21.5) A32(9.5,21.5) A33(10.5,21.5) A34(11.5,21.5) A35(12.5,21.5) A36(13.5,21.5) A37(14.5,21.5) A38(15.5,21.5) A39(16.5,21.5) A40(17.5,21.5) A41(18.5,21.5) A42(19.5,21.5) AA1(-21.5,1.5) AA2(-20.5,1.5) AA3(-19.5,1.5) AA4(-18.5,1.5) AA5(-17.5,1.5) AA6(-16.5,1.5) AA7(-15.5,1.5) AA8(-14.5,1.5) AA9(-13.5,1.5) AA10(-12.5,1.5) AA11(-11.5,1.5) AA12(-10.5,1.5) AA13(-9.5,1.5) AA14(-8.5,1.5) AA15(-7.5,1.5) AA16(-6.5,1.5) AA17(-5.5,1.5) AA18(-4.5,1.5) AA19(-3.5,1.5) AA20(-2.5,1.5) AA21(-1.5,1.5) AA22(-0.5,1.5) AA23(0.5,1.5) AA24(1.5,1.5) AA25(2.5,1.5) AA26(3.5,1.5) AA27(4.5,1.5) AA28(5.5,1.5) AA29(6.5,1.5) AA30(7.5,1.5) AA31(8.5,1.5) AA32(9.5,1.5) AA33(10.5,1.5) AA34(11.5,1.5) AA35(12.5,1.5) AA36(13.5,1.5) AA37(14.5,1.5) AA38(15.5,1.5) AA39(16.5,1.5) AA40(17.5,1.5) AA41(18.5,1.5) AA42(19.5,1.5) AA43(20.5,1.5) AA44(21.5,1.5) AB1(-21.5,0.5) AB2(-20.5,0.5) AB3(-19.5,0.5) AB4(-18.5,0.5) AB5(-17.5,0.5) AB6(-16.5,0.5) AB7(-15.5,0.5) AB8(-14.5,0.5) AB9(-13.5,0.5) AB10(-12.5,0.5) AB11(-11.5,0.5) AB12(-10.5,0.5) AB13(-9.5,0.5) AB14(-8.5,0.5) AB15(-7.5,0.5) AB16(-6.5,0.5) AB17(-5.5,0.5) AB18(-4.5,0.5) AB19(-3.5,0.5) AB20(-2.5,0.5) AB21(-1.5,0.5) AB22(-0.5,0.5) AB23(0.5,0.5) AB24(1.5,0.5) AB25(2.5,0.5) AB26(3.5,0.5) AB27(4.5,0.5) AB28(5.5,0.5) AB29(6.5,0.5) AB30(7.5,0.5) AB31(8.5,0.5) AB32(9.5,0.5) AB33(10.5,0.5) AB34(11.5,0.5) AB35(12.5,0.5) AB36(13.5,0.5) AB37(14.5,0.5) AB38(15.5,0.5) AB39(16.5,0.5) AB40(17.5,0.5) AB41(18.5,0.5) AB42(19.5,0.5) AB43(20.5,0.5) AB44(21.5,0.5) AC1(-21.5,-0.5) AC2(-20.5,-0.5) AC3(-19.5,-0.5) AC4(-18.5,-0.5) AC5(-17.5,-0.5) AC6(-16.5,-0.5) AC7(-15.5,-0.5) AC8(-14.5,-0.5) AC9(-13.5,-0.5) AC10(-12.5,-0.5) AC11(-11.5,-0.5) AC12(-10.5,-0.5) AC13(-9.5,-0.5) AC14(-8.5,-0.5) AC15(-7.5,-0.5) AC16(-6.5,-0.5) AC17(-5.5,-0.5) AC18(-4.5,-0.5) AC19(-3.5,-0.5) AC20(-2.5,-0.5) AC21(-1.5,-0.5) AC22(-0.5,-0.5) AC23(0.5,-0.5) AC24(1.5,-0.5) AC25(2.5,-0.5) AC26(3.5,-0.5) AC27(4.5,-0.5) AC28(5.5,-0.5) AC29(6.5,-0.5) AC30(7.5,-0.5) AC31(8.5,-0.5) AC32(9.5,-0.5) AC33(10.5,-0.5) AC34(11.5,-0.5) AC35(12.5,-0.5) AC36(13.5,-0.5) AC37(14.5,-0.5) AC38(15.5,-0.5) AC39(16.5,-0.5) AC40(17.5,-0.5) AC41(18.5,-0.5) AC42(19.5,-0.5) AC43(20.5,-0.5) AC44(21.5,-0.5) AD1(-21.5,-1.5) AD2(-20.5,-1.5) AD3(-19.5,-1.5) AD4(-18.5,-1.5) AD5(-17.5,-1.5) AD6(-16.5,-1.5) AD7(-15.5,-1.5) AD8(-14.5,-1.5) AD9(-13.5,-1.5) AD10(-12.5,-1.5) AD11(-11.5,-1.5) AD12(-10.5,-1.5) AD13(-9.5,-1.5) AD14(-8.5,-1.5) AD15(-7.5,-1.5) AD16(-6.5,-1.5) AD17(-5.5,-1.5) AD18(-4.5,-1.5) AD19(-3.5,-1.5) AD20(-2.5,-1.5) AD21(-1.5,-1.5) AD22(-0.5,-1.5) AD23(0.5,-1.5) AD24(1.5,-1.5) AD25(2.5,-1.5) AD26(3.5,-1.5) AD27(4.5,-1.5) AD28(5.5,-1.5) AD29(6.5,-1.5) AD30(7.5,-1.5) AD31(8.5,-1.5) AD32(9.5,-1.5) AD33(10.5,-1.5) AD34(11.5,-1.5) AD35(12.5,-1.5) AD36(13.5,-1.5) AD37(14.5,-1.5) AD38(15.5,-1.5) AD39(16.5,-1.5) AD40(17.5,-1.5) AD41(18.5,-1.5) AD42(19.5,-1.5) AD43(20.5,-1.5) AD44(21.5,-1.5) AE1(-21.5,-2.5) AE2(-20.5,-2.5) AE3(-19.5,-2.5) AE4(-18.5,-2.5) AE5(-17.5,-2.5) AE6(-16.5,-2.5) AE7(-15.5,-2.5) AE8(-14.5,-2.5) AE9(-13.5,-2.5) AE10(-12.5,-2.5) AE11(-11.5,-2.5) AE12(-10.5,-2.5) AE13(-9.5,-2.5) AE14(-8.5,-2.5) AE15(-7.5,-2.5) AE16(-6.5,-2.5) AE17(-5.5,-2.5) AE18(-4.5,-2.5) AE19(-3.5,-2.5) AE20(-2.5,-2.5) AE21(-1.5,-2.5) AE22(-0.5,-2.5) AE23(0.5,-2.5) AE24(1.5,-2.5) AE25(2.5,-2.5) AE26(3.5,-2.5) AE27(4.5,-2.5) AE28(5.5,-2.5) AE29(6.5,-2.5) AE30(7.5,-2.5) AE31(8.5,-2.5) AE32(9.5,-2.5) AE33(10.5,-2.5) AE34(11.5,-2.5) AE35(12.5,-2.5) AE36(13.5,-2.5) AE37(14.5,-2.5) AE38(15.5,-2.5) AE39(16.5,-2.5) AE40(17.5,-2.5) AE41(18.5,-2.5) AE42(19.5,-2.5) AE43(20.5,-2.5) AE44(21.5,-2.5) AF1(-21.5,-3.5) AF2(-20.5,-3.5) AF3(-19.5,-3.5) AF4(-18.5,-3.5) AF5(-17.5,-3.5) AF6(-16.5,-3.5) AF7(-15.5,-3.5) AF8(-14.5,-3.5) AF9(-13.5,-3.5) AF10(-12.5,-3.5) AF11(-11.5,-3.5) AF12(-10.5,-3.5) AF13(-9.5,-3.5) AF14(-8.5,-3.5) AF15(-7.5,-3.5) AF16(-6.5,-3.5) AF17(-5.5,-3.5) AF18(-4.5,-3.5) AF19(-3.5,-3.5) AF20(-2.5,-3.5) AF21(-1.5,-3.5) AF22(-0.5,-3.5) AF23(0.5,-3.5) AF24(1.5,-3.5) AF25(2.5,-3.5) AF26(3.5,-3.5) AF27(4.5,-3.5) AF28(5.5,-3.5) AF29(6.5,-3.5) AF30(7.5,-3.5) AF31(8.5,-3.5) AF32(9.5,-3.5) AF33(10.5,-3.5) AF34(11.5,-3.5) AF35(12.5,-3.5) AF36(13.5,-3.5) AF37(14.5,-3.5) AF38(15.5,-3.5) AF39(16.5,-3.5) AF40(17.5,-3.5) AF41(18.5,-3.5) AF42(19.5,-3.5) AF43(20.5,-3.5) AF44(21.5,-3.5) AG1(-21.5,-4.5) AG2(-20.5,-4.5) AG3(-19.5,-4.5) AG4(-18.5,-4.5) AG5(-17.5,-4.5) AG6(-16.5,-4.5) AG7(-15.5,-4.5) AG8(-14.5,-4.5) AG9(-13.5,-4.5) AG10(-12.5,-4.5) AG11(-11.5,-4.5) AG12(-10.5,-4.5) AG13(-9.5,-4.5) AG14(-8.5,-4.5) AG15(-7.5,-4.5) AG16(-6.5,-4.5) AG17(-5.5,-4.5) AG18(-4.5,-4.5) AG19(-3.5,-4.5) AG20(-2.5,-4.5) AG21(-1.5,-4.5) AG22(-0.5,-4.5) AG23(0.5,-4.5) AG24(1.5,-4.5) AG25(2.5,-4.5) AG26(3.5,-4.5) AG27(4.5,-4.5) AG28(5.5,-4.5) AG29(6.5,-4.5) AG30(7.5,-4.5) AG31(8.5,-4.5) AG32(9.5,-4.5) AG33(10.5,-4.5) AG34(11.5,-4.5) AG35(12.5,-4.5) AG36(13.5,-4.5) AG37(14.5,-4.5) AG38(15.5,-4.5) AG39(16.5,-4.5) AG40(17.5,-4.5) AG41(18.5,-4.5) AG42(19.5,-4.5) AG43(20.5,-4.5) AG44(21.5,-4.5) AH1(-21.5,-5.5) AH2(-20.5,-5.5) AH3(-19.5,-5.5) AH4(-18.5,-5.5) AH5(-17.5,-5.5) AH6(-16.5,-5.5) AH7(-15.5,-5.5) AH8(-14.5,-5.5) AH9(-13.5,-5.5) AH10(-12.5,-5.5) AH11(-11.5,-5.5) AH12(-10.5,-5.5) AH13(-9.5,-5.5) AH14(-8.5,-5.5) AH15(-7.5,-5.5) AH16(-6.5,-5.5) AH17(-5.5,-5.5) AH18(-4.5,-5.5) AH19(-3.5,-5.5) AH20(-2.5,-5.5) AH21(-1.5,-5.5) AH22(-0.5,-5.5) AH23(0.5,-5.5) AH24(1.5,-5.5) AH25(2.5,-5.5) AH26(3.5,-5.5) AH27(4.5,-5.5) AH28(5.5,-5.5) AH29(6.5,-5.5) AH30(7.5,-5.5) AH31(8.5,-5.5) AH32(9.5,-5.5) AH33(10.5,-5.5) AH34(11.5,-5.5) AH35(12.5,-5.5) AH36(13.5,-5.5) AH37(14.5,-5.5) AH38(15.5,-5.5) AH39(16.5,-5.5) AH40(17.5,-5.5) AH41(18.5,-5.5) AH42(19.5,-5.5) AH43(20.5,-5.5) AH44(21.5,-5.5) AJ1(-21.5,-6.5) AJ2(-20.5,-6.5) AJ3(-19.5,-6.5) AJ4(-18.5,-6.5) AJ5(-17.5,-6.5) AJ6(-16.5,-6.5) AJ7(-15.5,-6.5) AJ8(-14.5,-6.5) AJ9(-13.5,-6.5) AJ10(-12.5,-6.5) AJ11(-11.5,-6.5) AJ12(-10.5,-6.5) AJ13(-9.5,-6.5) AJ14(-8.5,-6.5) AJ15(-7.5,-6.5) AJ16(-6.5,-6.5) AJ17(-5.5,-6.5) AJ18(-4.5,-6.5) AJ19(-3.5,-6.5) AJ20(-2.5,-6.5) AJ21(-1.5,-6.5) AJ22(-0.5,-6.5) AJ23(0.5,-6.5) AJ24(1.5,-6.5) AJ25(2.5,-6.5) AJ26(3.5,-6.5) AJ27(4.5,-6.5) AJ28(5.5,-6.5) AJ29(6.5,-6.5) AJ30(7.5,-6.5) AJ31(8.5,-6.5) AJ32(9.5,-6.5) AJ33(10.5,-6.5) AJ34(11.5,-6.5) AJ35(12.5,-6.5) AJ36(13.5,-6.5) AJ37(14.5,-6.5) AJ38(15.5,-6.5) AJ39(16.5,-6.5) AJ40(17.5,-6.5) AJ41(18.5,-6.5) AJ42(19.5,-6.5) AJ43(20.5,-6.5) AJ44(21.5,-6.5) AK1(-21.5,-7.5) AK2(-20.5,-7.5) AK3(-19.5,-7.5) AK4(-18.5,-7.5) AK5(-17.5,-7.5) AK6(-16.5,-7.5) AK7(-15.5,-7.5) AK8(-14.5,-7.5) AK9(-13.5,-7.5) AK10(-12.5,-7.5) AK11(-11.5,-7.5) AK12(-10.5,-7.5) AK13(-9.5,-7.5) AK14(-8.5,-7.5) AK15(-7.5,-7.5) AK16(-6.5,-7.5) AK17(-5.5,-7.5) AK18(-4.5,-7.5) AK19(-3.5,-7.5) AK20(-2.5,-7.5) AK21(-1.5,-7.5) AK22(-0.5,-7.5) AK23(0.5,-7.5) AK24(1.5,-7.5) AK25(2.5,-7.5) AK26(3.5,-7.5) AK27(4.5,-7.5) AK28(5.5,-7.5) AK29(6.5,-7.5) AK30(7.5,-7.5) AK31(8.5,-7.5) AK32(9.5,-7.5) AK33(10.5,-7.5) AK34(11.5,-7.5) AK35(12.5,-7.5) AK36(13.5,-7.5) AK37(14.5,-7.5) AK38(15.5,-7.5) AK39(16.5,-7.5) AK40(17.5,-7.5) AK41(18.5,-7.5) AK42(19.5,-7.5) AK43(20.5,-7.5) AK44(21.5,-7.5) AL1(-21.5,-8.5) AL2(-20.5,-8.5) AL3(-19.5,-8.5) AL4(-18.5,-8.5) AL5(-17.5,-8.5) AL6(-16.5,-8.5) AL7(-15.5,-8.5) AL8(-14.5,-8.5) AL9(-13.5,-8.5) AL10(-12.5,-8.5) AL11(-11.5,-8.5) AL12(-10.5,-8.5) AL13(-9.5,-8.5) AL14(-8.5,-8.5) AL15(-7.5,-8.5) AL16(-6.5,-8.5) AL17(-5.5,-8.5) AL18(-4.5,-8.5) AL19(-3.5,-8.5) AL20(-2.5,-8.5) AL21(-1.5,-8.5) AL22(-0.5,-8.5) AL23(0.5,-8.5) AL24(1.5,-8.5) AL25(2.5,-8.5) AL26(3.5,-8.5) AL27(4.5,-8.5) AL28(5.5,-8.5) AL29(6.5,-8.5) AL30(7.5,-8.5) AL31(8.5,-8.5) AL32(9.5,-8.5) AL33(10.5,-8.5) AL34(11.5,-8.5) AL35(12.5,-8.5) AL36(13.5,-8.5) AL37(14.5,-8.5) AL38(15.5,-8.5) AL39(16.5,-8.5) AL40(17.5,-8.5) AL41(18.5,-8.5) AL42(19.5,-8.5) AL43(20.5,-8.5) AL44(21.5,-8.5) AM1(-21.5,-9.5) AM2(-20.5,-9.5) AM3(-19.5,-9.5) AM4(-18.5,-9.5) AM5(-17.5,-9.5) AM6(-16.5,-9.5) AM7(-15.5,-9.5) AM8(-14.5,-9.5) AM9(-13.5,-9.5) AM10(-12.5,-9.5) AM11(-11.5,-9.5) AM12(-10.5,-9.5) AM13(-9.5,-9.5) AM14(-8.5,-9.5) AM15(-7.5,-9.5) AM16(-6.5,-9.5) AM17(-5.5,-9.5) AM18(-4.5,-9.5) AM19(-3.5,-9.5) AM20(-2.5,-9.5) AM21(-1.5,-9.5) AM22(-0.5,-9.5) AM23(0.5,-9.5) AM24(1.5,-9.5) AM25(2.5,-9.5) AM26(3.5,-9.5) AM27(4.5,-9.5) AM28(5.5,-9.5) AM29(6.5,-9.5) AM30(7.5,-9.5) AM31(8.5,-9.5) AM32(9.5,-9.5) AM33(10.5,-9.5) AM34(11.5,-9.5) AM35(12.5,-9.5) AM36(13.5,-9.5) AM37(14.5,-9.5) AM38(15.5,-9.5) AM39(16.5,-9.5) AM40(17.5,-9.5) AM41(18.5,-9.5) AM42(19.5,-9.5) AM43(20.5,-9.5) AM44(21.5,-9.5) AN1(-21.5,-10.5) AN2(-20.5,-10.5) AN3(-19.5,-10.5) AN4(-18.5,-10.5) AN5(-17.5,-10.5) AN6(-16.5,-10.5) AN7(-15.5,-10.5) AN8(-14.5,-10.5) AN9(-13.5,-10.5) AN10(-12.5,-10.5) AN11(-11.5,-10.5) AN12(-10.5,-10.5) AN13(-9.5,-10.5) AN14(-8.5,-10.5) AN15(-7.5,-10.5) AN16(-6.5,-10.5) AN17(-5.5,-10.5) AN18(-4.5,-10.5) AN19(-3.5,-10.5) AN20(-2.5,-10.5) AN21(-1.5,-10.5) AN22(-0.5,-10.5) AN23(0.5,-10.5) AN24(1.5,-10.5) AN25(2.5,-10.5) AN26(3.5,-10.5) AN27(4.5,-10.5) AN28(5.5,-10.5) AN29(6.5,-10.5) AN30(7.5,-10.5) AN31(8.5,-10.5) AN32(9.5,-10.5) AN33(10.5,-10.5) AN34(11.5,-10.5) AN35(12.5,-10.5) AN36(13.5,-10.5) AN37(14.5,-10.5) AN38(15.5,-10.5) AN39(16.5,-10.5) AN40(17.5,-10.5) AN41(18.5,-10.5) AN42(19.5,-10.5) AN43(20.5,-10.5) AN44(21.5,-10.5) AP1(-21.5,-11.5) AP2(-20.5,-11.5) AP3(-19.5,-11.5) AP4(-18.5,-11.5) AP5(-17.5,-11.5) AP6(-16.5,-11.5) AP7(-15.5,-11.5) AP8(-14.5,-11.5) AP9(-13.5,-11.5) AP10(-12.5,-11.5) AP11(-11.5,-11.5) AP12(-10.5,-11.5) AP13(-9.5,-11.5) AP14(-8.5,-11.5) AP15(-7.5,-11.5) AP16(-6.5,-11.5) AP17(-5.5,-11.5) AP18(-4.5,-11.5) AP19(-3.5,-11.5) AP20(-2.5,-11.5) AP21(-1.5,-11.5) AP22(-0.5,-11.5) AP23(0.5,-11.5) AP24(1.5,-11.5) AP25(2.5,-11.5) AP26(3.5,-11.5) AP27(4.5,-11.5) AP28(5.5,-11.5) AP29(6.5,-11.5) AP30(7.5,-11.5) AP31(8.5,-11.5) AP32(9.5,-11.5) AP33(10.5,-11.5) AP34(11.5,-11.5) AP35(12.5,-11.5) AP36(13.5,-11.5) AP37(14.5,-11.5) AP38(15.5,-11.5) AP39(16.5,-11.5) AP40(17.5,-11.5) AP41(18.5,-11.5) AP42(19.5,-11.5) AP43(20.5,-11.5) AP44(21.5,-11.5) AR1(-21.5,-12.5) AR2(-20.5,-12.5) AR3(-19.5,-12.5) AR4(-18.5,-12.5) AR5(-17.5,-12.5) AR6(-16.5,-12.5) AR7(-15.5,-12.5) AR8(-14.5,-12.5) AR9(-13.5,-12.5) AR10(-12.5,-12.5) AR11(-11.5,-12.5) AR12(-10.5,-12.5) AR13(-9.5,-12.5) AR14(-8.5,-12.5) AR15(-7.5,-12.5) AR16(-6.5,-12.5) AR17(-5.5,-12.5) AR18(-4.5,-12.5) AR19(-3.5,-12.5) AR20(-2.5,-12.5) AR21(-1.5,-12.5) AR22(-0.5,-12.5) AR23(0.5,-12.5) AR24(1.5,-12.5) AR25(2.5,-12.5) AR26(3.5,-12.5) AR27(4.5,-12.5) AR28(5.5,-12.5) AR29(6.5,-12.5) AR30(7.5,-12.5) AR31(8.5,-12.5) AR32(9.5,-12.5) AR33(10.5,-12.5) AR34(11.5,-12.5) AR35(12.5,-12.5) AR36(13.5,-12.5) AR37(14.5,-12.5) AR38(15.5,-12.5) AR39(16.5,-12.5) AR40(17.5,-12.5) AR41(18.5,-12.5) AR42(19.5,-12.5) AR43(20.5,-12.5) AR44(21.5,-12.5) AT1(-21.5,-13.5) AT2(-20.5,-13.5) AT3(-19.5,-13.5) AT4(-18.5,-13.5) AT5(-17.5,-13.5) AT6(-16.5,-13.5) AT7(-15.5,-13.5) AT8(-14.5,-13.5) AT9(-13.5,-13.5) AT10(-12.5,-13.5) AT11(-11.5,-13.5) AT12(-10.5,-13.5) AT13(-9.5,-13.5) AT14(-8.5,-13.5) AT15(-7.5,-13.5) AT16(-6.5,-13.5) AT17(-5.5,-13.5) AT18(-4.5,-13.5) AT19(-3.5,-13.5) AT20(-2.5,-13.5) AT21(-1.5,-13.5) AT22(-0.5,-13.5) AT23(0.5,-13.5) AT24(1.5,-13.5) AT25(2.5,-13.5) AT26(3.5,-13.5) AT27(4.5,-13.5) AT28(5.5,-13.5) AT29(6.5,-13.5) AT30(7.5,-13.5) AT31(8.5,-13.5) AT32(9.5,-13.5) AT33(10.5,-13.5) AT34(11.5,-13.5) AT35(12.5,-13.5) AT36(13.5,-13.5) AT37(14.5,-13.5) AT38(15.5,-13.5) AT39(16.5,-13.5) AT40(17.5,-13.5) AT41(18.5,-13.5) AT42(19.5,-13.5) AT43(20.5,-13.5) AT44(21.5,-13.5) AU1(-21.5,-14.5) AU2(-20.5,-14.5) AU3(-19.5,-14.5) AU4(-18.5,-14.5) AU5(-17.5,-14.5) AU6(-16.5,-14.5) AU7(-15.5,-14.5) AU8(-14.5,-14.5) AU9(-13.5,-14.5) AU10(-12.5,-14.5) AU11(-11.5,-14.5) AU12(-10.5,-14.5) AU13(-9.5,-14.5) AU14(-8.5,-14.5) AU15(-7.5,-14.5) AU16(-6.5,-14.5) AU17(-5.5,-14.5) AU18(-4.5,-14.5) AU19(-3.5,-14.5) AU20(-2.5,-14.5) AU21(-1.5,-14.5) AU22(-0.5,-14.5) AU23(0.5,-14.5) AU24(1.5,-14.5) AU25(2.5,-14.5) AU26(3.5,-14.5) AU27(4.5,-14.5) AU28(5.5,-14.5) AU29(6.5,-14.5) AU30(7.5,-14.5) AU31(8.5,-14.5) AU32(9.5,-14.5) AU33(10.5,-14.5) AU34(11.5,-14.5) AU35(12.5,-14.5) AU36(13.5,-14.5) AU37(14.5,-14.5) AU38(15.5,-14.5) AU39(16.5,-14.5) AU40(17.5,-14.5) AU41(18.5,-14.5) AU42(19.5,-14.5) AU43(20.5,-14.5) AU44(21.5,-14.5) AV1(-21.5,-15.5) AV2(-20.5,-15.5) AV3(-19.5,-15.5) AV4(-18.5,-15.5) AV5(-17.5,-15.5) AV6(-16.5,-15.5) AV7(-15.5,-15.5) AV8(-14.5,-15.5) AV9(-13.5,-15.5) AV10(-12.5,-15.5) AV11(-11.5,-15.5) AV12(-10.5,-15.5) AV13(-9.5,-15.5) AV14(-8.5,-15.5) AV15(-7.5,-15.5) AV16(-6.5,-15.5) AV17(-5.5,-15.5) AV18(-4.5,-15.5) AV19(-3.5,-15.5) AV20(-2.5,-15.5) AV21(-1.5,-15.5) AV22(-0.5,-15.5) AV23(0.5,-15.5) AV24(1.5,-15.5) AV25(2.5,-15.5) AV26(3.5,-15.5) AV27(4.5,-15.5) AV28(5.5,-15.5) AV29(6.5,-15.5) AV30(7.5,-15.5) AV31(8.5,-15.5) AV32(9.5,-15.5) AV33(10.5,-15.5) AV34(11.5,-15.5) AV35(12.5,-15.5) AV36(13.5,-15.5) AV37(14.5,-15.5) AV38(15.5,-15.5) AV39(16.5,-15.5) AV40(17.5,-15.5) AV41(18.5,-15.5) AV42(19.5,-15.5) AV43(20.5,-15.5) AV44(21.5,-15.5) AW1(-21.5,-16.5) AW2(-20.5,-16.5) AW3(-19.5,-16.5) AW4(-18.5,-16.5) AW5(-17.5,-16.5) AW6(-16.5,-16.5) AW7(-15.5,-16.5) AW8(-14.5,-16.5) AW9(-13.5,-16.5) AW10(-12.5,-16.5) AW11(-11.5,-16.5) AW12(-10.5,-16.5) AW13(-9.5,-16.5) AW14(-8.5,-16.5) AW15(-7.5,-16.5) AW16(-6.5,-16.5) AW17(-5.5,-16.5) AW18(-4.5,-16.5) AW19(-3.5,-16.5) AW20(-2.5,-16.5) AW21(-1.5,-16.5) AW22(-0.5,-16.5) AW23(0.5,-16.5) AW24(1.5,-16.5) AW25(2.5,-16.5) AW26(3.5,-16.5) AW27(4.5,-16.5) AW28(5.5,-16.5) AW29(6.5,-16.5) AW30(7.5,-16.5) AW31(8.5,-16.5) AW32(9.5,-16.5) AW33(10.5,-16.5) AW34(11.5,-16.5) AW35(12.5,-16.5) AW36(13.5,-16.5) AW37(14.5,-16.5) AW38(15.5,-16.5) AW39(16.5,-16.5) AW40(17.5,-16.5) AW41(18.5,-16.5) AW42(19.5,-16.5) AW43(20.5,-16.5) AW44(21.5,-16.5) AY1(-21.5,-17.5) AY2(-20.5,-17.5) AY3(-19.5,-17.5) AY4(-18.5,-17.5) AY5(-17.5,-17.5) AY6(-16.5,-17.5) AY7(-15.5,-17.5) AY8(-14.5,-17.5) AY9(-13.5,-17.5) AY10(-12.5,-17.5) AY11(-11.5,-17.5) AY12(-10.5,-17.5) AY13(-9.5,-17.5) AY14(-8.5,-17.5) AY15(-7.5,-17.5) AY16(-6.5,-17.5) AY17(-5.5,-17.5) AY18(-4.5,-17.5) AY19(-3.5,-17.5) AY20(-2.5,-17.5) AY21(-1.5,-17.5) AY22(-0.5,-17.5) AY23(0.5,-17.5) AY24(1.5,-17.5) AY25(2.5,-17.5) AY26(3.5,-17.5) AY27(4.5,-17.5) AY28(5.5,-17.5) AY29(6.5,-17.5) AY30(7.5,-17.5) AY31(8.5,-17.5) AY32(9.5,-17.5) AY33(10.5,-17.5) AY34(11.5,-17.5) AY35(12.5,-17.5) AY36(13.5,-17.5) AY37(14.5,-17.5) AY38(15.5,-17.5) AY39(16.5,-17.5) AY40(17.5,-17.5) AY41(18.5,-17.5) AY42(19.5,-17.5) AY43(20.5,-17.5) AY44(21.5,-17.5) B2(-20.5,20.5) B3(-19.5,20.5) B4(-18.5,20.5) B5(-17.5,20.5) B6(-16.5,20.5) B7(-15.5,20.5) B8(-14.5,20.5) B9(-13.5,20.5) B10(-12.5,20.5) B11(-11.5,20.5) B12(-10.5,20.5) B13(-9.5,20.5) B14(-8.5,20.5) B15(-7.5,20.5) B16(-6.5,20.5) B17(-5.5,20.5) B18(-4.5,20.5) B19(-3.5,20.5) B20(-2.5,20.5) B21(-1.5,20.5) B22(-0.5,20.5) B23(0.5,20.5) B24(1.5,20.5) B25(2.5,20.5) B26(3.5,20.5) B27(4.5,20.5) B28(5.5,20.5) B29(6.5,20.5) B30(7.5,20.5) B31(8.5,20.5) B32(9.5,20.5) B33(10.5,20.5) B34(11.5,20.5) B35(12.5,20.5) B36(13.5,20.5) B37(14.5,20.5) B38(15.5,20.5) B39(16.5,20.5) B40(17.5,20.5) B41(18.5,20.5) B42(19.5,20.5) B43(20.5,20.5) BA1(-21.5,-18.5) BA2(-20.5,-18.5) BA3(-19.5,-18.5) BA4(-18.5,-18.5) BA5(-17.5,-18.5) BA6(-16.5,-18.5) BA7(-15.5,-18.5) BA8(-14.5,-18.5) BA9(-13.5,-18.5) BA10(-12.5,-18.5) BA11(-11.5,-18.5) BA12(-10.5,-18.5) BA13(-9.5,-18.5) BA14(-8.5,-18.5) BA15(-7.5,-18.5) BA16(-6.5,-18.5) BA17(-5.5,-18.5) BA18(-4.5,-18.5) BA19(-3.5,-18.5) BA20(-2.5,-18.5) BA21(-1.5,-18.5) BA22(-0.5,-18.5) BA23(0.5,-18.5) BA24(1.5,-18.5) BA25(2.5,-18.5) BA26(3.5,-18.5) BA27(4.5,-18.5) BA28(5.5,-18.5) BA29(6.5,-18.5) BA30(7.5,-18.5) BA31(8.5,-18.5) BA32(9.5,-18.5) BA33(10.5,-18.5) BA34(11.5,-18.5) BA35(12.5,-18.5) BA36(13.5,-18.5) BA37(14.5,-18.5) BA38(15.5,-18.5) BA39(16.5,-18.5) BA40(17.5,-18.5) BA41(18.5,-18.5) BA42(19.5,-18.5) BA43(20.5,-18.5) BA44(21.5,-18.5) BB1(-21.5,-19.5) BB2(-20.5,-19.5) BB3(-19.5,-19.5) BB4(-18.5,-19.5) BB5(-17.5,-19.5) BB6(-16.5,-19.5) BB7(-15.5,-19.5) BB8(-14.5,-19.5) BB9(-13.5,-19.5) BB10(-12.5,-19.5) BB11(-11.5,-19.5) BB12(-10.5,-19.5) BB13(-9.5,-19.5) BB14(-8.5,-19.5) BB15(-7.5,-19.5) BB16(-6.5,-19.5) BB17(-5.5,-19.5) BB18(-4.5,-19.5) BB19(-3.5,-19.5) BB20(-2.5,-19.5) BB21(-1.5,-19.5) BB22(-0.5,-19.5) BB23(0.5,-19.5) BB24(1.5,-19.5) BB25(2.5,-19.5) BB26(3.5,-19.5) BB27(4.5,-19.5) BB28(5.5,-19.5) BB29(6.5,-19.5) BB30(7.5,-19.5) BB31(8.5,-19.5) BB32(9.5,-19.5) BB33(10.5,-19.5) BB34(11.5,-19.5) BB35(12.5,-19.5) BB36(13.5,-19.5) BB37(14.5,-19.5) BB38(15.5,-19.5) BB39(16.5,-19.5) BB40(17.5,-19.5) BB41(18.5,-19.5) BB42(19.5,-19.5) BB43(20.5,-19.5) BB44(21.5,-19.5) BC2(-20.5,-20.5) BC3(-19.5,-20.5) BC4(-18.5,-20.5) BC5(-17.5,-20.5) BC6(-16.5,-20.5) BC7(-15.5,-20.5) BC8(-14.5,-20.5) BC9(-13.5,-20.5) BC10(-12.5,-20.5) BC11(-11.5,-20.5) BC12(-10.5,-20.5) BC13(-9.5,-20.5) BC14(-8.5,-20.5) BC15(-7.5,-20.5) BC16(-6.5,-20.5) BC17(-5.5,-20.5) BC18(-4.5,-20.5) BC19(-3.5,-20.5) BC20(-2.5,-20.5) BC21(-1.5,-20.5) BC22(-0.5,-20.5) BC23(0.5,-20.5) BC24(1.5,-20.5) BC25(2.5,-20.5) BC26(3.5,-20.5) BC27(4.5,-20.5) BC28(5.5,-20.5) BC29(6.5,-20.5) BC30(7.5,-20.5) BC31(8.5,-20.5) BC32(9.5,-20.5) BC33(10.5,-20.5) BC34(11.5,-20.5) BC35(12.5,-20.5) BC36(13.5,-20.5) BC37(14.5,-20.5) BC38(15.5,-20.5) BC39(16.5,-20.5) BC40(17.5,-20.5) BC41(18.5,-20.5) BC42(19.5,-20.5) BC43(20.5,-20.5) BD3(-19.5,-21.5) BD4(-18.5,-21.5) BD5(-17.5,-21.5) BD6(-16.5,-21.5) BD7(-15.5,-21.5) BD8(-14.5,-21.5) BD9(-13.5,-21.5) BD10(-12.5,-21.5) BD11(-11.5,-21.5) BD12(-10.5,-21.5) BD13(-9.5,-21.5) BD14(-8.5,-21.5) BD15(-7.5,-21.5) BD16(-6.5,-21.5) BD17(-5.5,-21.5) BD18(-4.5,-21.5) BD19(-3.5,-21.5) BD20(-2.5,-21.5) BD21(-1.5,-21.5) BD22(-0.5,-21.5) BD23(0.5,-21.5) BD24(1.5,-21.5) BD25(2.5,-21.5) BD26(3.5,-21.5) BD27(4.5,-21.5) BD28(5.5,-21.5) BD29(6.5,-21.5) BD30(7.5,-21.5) BD31(8.5,-21.5) BD32(9.5,-21.5) BD33(10.5,-21.5) BD34(11.5,-21.5) BD35(12.5,-21.5) BD36(13.5,-21.5) BD37(14.5,-21.5) BD38(15.5,-21.5) BD39(16.5,-21.5) BD40(17.5,-21.5) BD41(18.5,-21.5) BD42(19.5,-21.5) C1(-21.5,19.5) C2(-20.5,19.5) C3(-19.5,19.5) C4(-18.5,19.5) C5(-17.5,19.5) C6(-16.5,19.5) C7(-15.5,19.5) C8(-14.5,19.5) C9(-13.5,19.5) C10(-12.5,19.5) C11(-11.5,19.5) C12(-10.5,19.5) C13(-9.5,19.5) C14(-8.5,19.5) C15(-7.5,19.5) C16(-6.5,19.5) C17(-5.5,19.5) C18(-4.5,19.5) C19(-3.5,19.5) C20(-2.5,19.5) C21(-1.5,19.5) C22(-0.5,19.5) C23(0.5,19.5) C24(1.5,19.5) C25(2.5,19.5) C26(3.5,19.5) C27(4.5,19.5) C28(5.5,19.5) C29(6.5,19.5) C30(7.5,19.5) C31(8.5,19.5) C32(9.5,19.5) C33(10.5,19.5) C34(11.5,19.5) C35(12.5,19.5) C36(13.5,19.5) C37(14.5,19.5) C38(15.5,19.5) C39(16.5,19.5) C40(17.5,19.5) C41(18.5,19.5) C42(19.5,19.5) C43(20.5,19.5) C44(21.5,19.5) D1(-21.5,18.5) D2(-20.5,18.5) D3(-19.5,18.5) D4(-18.5,18.5) D5(-17.5,18.5) D6(-16.5,18.5) D7(-15.5,18.5) D8(-14.5,18.5) D9(-13.5,18.5) D10(-12.5,18.5) D11(-11.5,18.5) D12(-10.5,18.5) D13(-9.5,18.5) D14(-8.5,18.5) D15(-7.5,18.5) D16(-6.5,18.5) D17(-5.5,18.5) D18(-4.5,18.5) D19(-3.5,18.5) D20(-2.5,18.5) D21(-1.5,18.5) D22(-0.5,18.5) D23(0.5,18.5) D24(1.5,18.5) D25(2.5,18.5) D26(3.5,18.5) D27(4.5,18.5) D28(5.5,18.5) D29(6.5,18.5) D30(7.5,18.5) D31(8.5,18.5) D32(9.5,18.5) D33(10.5,18.5) D34(11.5,18.5) D35(12.5,18.5) D36(13.5,18.5) D37(14.5,18.5) D38(15.5,18.5) D39(16.5,18.5) D40(17.5,18.5) D41(18.5,18.5) D42(19.5,18.5) D43(20.5,18.5) D44(21.5,18.5) E1(-21.5,17.5) E2(-20.5,17.5) E3(-19.5,17.5) E4(-18.5,17.5) E5(-17.5,17.5) E6(-16.5,17.5) E7(-15.5,17.5) E8(-14.5,17.5) E9(-13.5,17.5) E10(-12.5,17.5) E11(-11.5,17.5) E12(-10.5,17.5) E13(-9.5,17.5) E14(-8.5,17.5) E15(-7.5,17.5) E16(-6.5,17.5) E17(-5.5,17.5) E18(-4.5,17.5) E19(-3.5,17.5) E20(-2.5,17.5) E21(-1.5,17.5) E22(-0.5,17.5) E23(0.5,17.5) E24(1.5,17.5) E25(2.5,17.5) E26(3.5,17.5) E27(4.5,17.5) E28(5.5,17.5) E29(6.5,17.5) E30(7.5,17.5) E31(8.5,17.5) E32(9.5,17.5) E33(10.5,17.5) E34(11.5,17.5) E35(12.5,17.5) E36(13.5,17.5) E37(14.5,17.5) E38(15.5,17.5) E39(16.5,17.5) E40(17.5,17.5) E41(18.5,17.5) E42(19.5,17.5) E43(20.5,17.5) E44(21.5,17.5) F1(-21.5,16.5) F2(-20.5,16.5) F3(-19.5,16.5) F4(-18.5,16.5) F5(-17.5,16.5) F6(-16.5,16.5) F7(-15.5,16.5) F8(-14.5,16.5) F9(-13.5,16.5) F10(-12.5,16.5) F11(-11.5,16.5) F12(-10.5,16.5) F13(-9.5,16.5) F14(-8.5,16.5) F15(-7.5,16.5) F16(-6.5,16.5) F17(-5.5,16.5) F18(-4.5,16.5) F19(-3.5,16.5) F20(-2.5,16.5) F21(-1.5,16.5) F22(-0.5,16.5) F23(0.5,16.5) F24(1.5,16.5) F25(2.5,16.5) F26(3.5,16.5) F27(4.5,16.5) F28(5.5,16.5) F29(6.5,16.5) F30(7.5,16.5) F31(8.5,16.5) F32(9.5,16.5) F33(10.5,16.5) F34(11.5,16.5) F35(12.5,16.5) F36(13.5,16.5) F37(14.5,16.5) F38(15.5,16.5) F39(16.5,16.5) F40(17.5,16.5) F41(18.5,16.5) F42(19.5,16.5) F43(20.5,16.5) F44(21.5,16.5) G1(-21.5,15.5) G2(-20.5,15.5) G3(-19.5,15.5) G4(-18.5,15.5) G5(-17.5,15.5) G6(-16.5,15.5) G7(-15.5,15.5) G8(-14.5,15.5) G9(-13.5,15.5) G10(-12.5,15.5) G11(-11.5,15.5) G12(-10.5,15.5) G13(-9.5,15.5) G14(-8.5,15.5) G15(-7.5,15.5) G16(-6.5,15.5) G17(-5.5,15.5) G18(-4.5,15.5) G19(-3.5,15.5) G20(-2.5,15.5) G21(-1.5,15.5) G22(-0.5,15.5) G23(0.5,15.5) G24(1.5,15.5) G25(2.5,15.5) G26(3.5,15.5) G27(4.5,15.5) G28(5.5,15.5) G29(6.5,15.5) G30(7.5,15.5) G31(8.5,15.5) G32(9.5,15.5) G33(10.5,15.5) G34(11.5,15.5) G35(12.5,15.5) G36(13.5,15.5) G37(14.5,15.5) G38(15.5,15.5) G39(16.5,15.5) G40(17.5,15.5) G41(18.5,15.5) G42(19.5,15.5) G43(20.5,15.5) G44(21.5,15.5) H1(-21.5,14.5) H2(-20.5,14.5) H3(-19.5,14.5) H4(-18.5,14.5) H5(-17.5,14.5) H6(-16.5,14.5) H7(-15.5,14.5) H8(-14.5,14.5) H9(-13.5,14.5) H10(-12.5,14.5) H11(-11.5,14.5) H12(-10.5,14.5) H13(-9.5,14.5) H14(-8.5,14.5) H15(-7.5,14.5) H16(-6.5,14.5) H17(-5.5,14.5) H18(-4.5,14.5) H19(-3.5,14.5) H20(-2.5,14.5) H21(-1.5,14.5) H22(-0.5,14.5) H23(0.5,14.5) H24(1.5,14.5) H25(2.5,14.5) H26(3.5,14.5) H27(4.5,14.5) H28(5.5,14.5) H29(6.5,14.5) H30(7.5,14.5) H31(8.5,14.5) H32(9.5,14.5) H33(10.5,14.5) H34(11.5,14.5) H35(12.5,14.5) H36(13.5,14.5) H37(14.5,14.5) H38(15.5,14.5) H39(16.5,14.5) H40(17.5,14.5) H41(18.5,14.5) H42(19.5,14.5) H43(20.5,14.5) H44(21.5,14.5) J1(-21.5,13.5) J2(-20.5,13.5) J3(-19.5,13.5) J4(-18.5,13.5) J5(-17.5,13.5) J6(-16.5,13.5) J7(-15.5,13.5) J8(-14.5,13.5) J9(-13.5,13.5) J10(-12.5,13.5) J11(-11.5,13.5) J12(-10.5,13.5) J13(-9.5,13.5) J14(-8.5,13.5) J15(-7.5,13.5) J16(-6.5,13.5) J17(-5.5,13.5) J18(-4.5,13.5) J19(-3.5,13.5) J20(-2.5,13.5) J21(-1.5,13.5) J22(-0.5,13.5) J23(0.5,13.5) J24(1.5,13.5) J25(2.5,13.5) J26(3.5,13.5) J27(4.5,13.5) J28(5.5,13.5) J29(6.5,13.5) J30(7.5,13.5) J31(8.5,13.5) J32(9.5,13.5) J33(10.5,13.5) J34(11.5,13.5) J35(12.5,13.5) J36(13.5,13.5) J37(14.5,13.5) J38(15.5,13.5) J39(16.5,13.5) J40(17.5,13.5) J41(18.5,13.5) J42(19.5,13.5) J43(20.5,13.5) J44(21.5,13.5) K1(-21.5,12.5) K2(-20.5,12.5) K3(-19.5,12.5) K4(-18.5,12.5) K5(-17.5,12.5) K6(-16.5,12.5) K7(-15.5,12.5) K8(-14.5,12.5) K9(-13.5,12.5) K10(-12.5,12.5) K11(-11.5,12.5) K12(-10.5,12.5) K13(-9.5,12.5) K14(-8.5,12.5) K15(-7.5,12.5) K16(-6.5,12.5) K17(-5.5,12.5) K18(-4.5,12.5) K19(-3.5,12.5) K20(-2.5,12.5) K21(-1.5,12.5) K22(-0.5,12.5) K23(0.5,12.5) K24(1.5,12.5) K25(2.5,12.5) K26(3.5,12.5) K27(4.5,12.5) K28(5.5,12.5) K29(6.5,12.5) K30(7.5,12.5) K31(8.5,12.5) K32(9.5,12.5) K33(10.5,12.5) K34(11.5,12.5) K35(12.5,12.5) K36(13.5,12.5) K37(14.5,12.5) K38(15.5,12.5) K39(16.5,12.5) K40(17.5,12.5) K41(18.5,12.5) K42(19.5,12.5) K43(20.5,12.5) K44(21.5,12.5) L1(-21.5,11.5) L2(-20.5,11.5) L3(-19.5,11.5) L4(-18.5,11.5) L5(-17.5,11.5) L6(-16.5,11.5) L7(-15.5,11.5) L8(-14.5,11.5) L9(-13.5,11.5) L10(-12.5,11.5) L11(-11.5,11.5) L12(-10.5,11.5) L13(-9.5,11.5) L14(-8.5,11.5) L15(-7.5,11.5) L16(-6.5,11.5) L17(-5.5,11.5) L18(-4.5,11.5) L19(-3.5,11.5) L20(-2.5,11.5) L21(-1.5,11.5) L22(-0.5,11.5) L23(0.5,11.5) L24(1.5,11.5) L25(2.5,11.5) L26(3.5,11.5) L27(4.5,11.5) L28(5.5,11.5) L29(6.5,11.5) L30(7.5,11.5) L31(8.5,11.5) L32(9.5,11.5) L33(10.5,11.5) L34(11.5,11.5) L35(12.5,11.5) L36(13.5,11.5) L37(14.5,11.5) L38(15.5,11.5) L39(16.5,11.5) L40(17.5,11.5) L41(18.5,11.5) L42(19.5,11.5) L43(20.5,11.5) L44(21.5,11.5) M1(-21.5,10.5) M2(-20.5,10.5) M3(-19.5,10.5) M4(-18.5,10.5) M5(-17.5,10.5) M6(-16.5,10.5) M7(-15.5,10.5) M8(-14.5,10.5) M9(-13.5,10.5) M10(-12.5,10.5) M11(-11.5,10.5) M12(-10.5,10.5) M13(-9.5,10.5) M14(-8.5,10.5) M15(-7.5,10.5) M16(-6.5,10.5) M17(-5.5,10.5) M18(-4.5,10.5) M19(-3.5,10.5) M20(-2.5,10.5) M21(-1.5,10.5) M22(-0.5,10.5) M23(0.5,10.5) M24(1.5,10.5) M25(2.5,10.5) M26(3.5,10.5) M27(4.5,10.5) M28(5.5,10.5) M29(6.5,10.5) M30(7.5,10.5) M31(8.5,10.5) M32(9.5,10.5) M33(10.5,10.5) M34(11.5,10.5) M35(12.5,10.5) M36(13.5,10.5) M37(14.5,10.5) M38(15.5,10.5) M39(16.5,10.5) M40(17.5,10.5) M41(18.5,10.5) M42(19.5,10.5) M43(20.5,10.5) M44(21.5,10.5) N1(-21.5,9.5) N2(-20.5,9.5) N3(-19.5,9.5) N4(-18.5,9.5) N5(-17.5,9.5) N6(-16.5,9.5) N7(-15.5,9.5) N8(-14.5,9.5) N9(-13.5,9.5) N10(-12.5,9.5) N11(-11.5,9.5) N12(-10.5,9.5) N13(-9.5,9.5) N14(-8.5,9.5) N15(-7.5,9.5) N16(-6.5,9.5) N17(-5.5,9.5) N18(-4.5,9.5) N19(-3.5,9.5) N20(-2.5,9.5) N21(-1.5,9.5) N22(-0.5,9.5) N23(0.5,9.5) N24(1.5,9.5) N25(2.5,9.5) N26(3.5,9.5) N27(4.5,9.5) N28(5.5,9.5) N29(6.5,9.5) N30(7.5,9.5) N31(8.5,9.5) N32(9.5,9.5) N33(10.5,9.5) N34(11.5,9.5) N35(12.5,9.5) N36(13.5,9.5) N37(14.5,9.5) N38(15.5,9.5) N39(16.5,9.5) N40(17.5,9.5) N41(18.5,9.5) N42(19.5,9.5) N43(20.5,9.5) N44(21.5,9.5) P1(-21.5,8.5) P2(-20.5,8.5) P3(-19.5,8.5) P4(-18.5,8.5) P5(-17.5,8.5) P6(-16.5,8.5) P7(-15.5,8.5) P8(-14.5,8.5) P9(-13.5,8.5) P10(-12.5,8.5) P11(-11.5,8.5) P12(-10.5,8.5) P13(-9.5,8.5) P14(-8.5,8.5) P15(-7.5,8.5) P16(-6.5,8.5) P17(-5.5,8.5) P18(-4.5,8.5) P19(-3.5,8.5) P20(-2.5,8.5) P21(-1.5,8.5) P22(-0.5,8.5) P23(0.5,8.5) P24(1.5,8.5) P25(2.5,8.5) P26(3.5,8.5) P27(4.5,8.5) P28(5.5,8.5) P29(6.5,8.5) P30(7.5,8.5) P31(8.5,8.5) P32(9.5,8.5) P33(10.5,8.5) P34(11.5,8.5) P35(12.5,8.5) P36(13.5,8.5) P37(14.5,8.5) P38(15.5,8.5) P39(16.5,8.5) P40(17.5,8.5) P41(18.5,8.5) P42(19.5,8.5) P43(20.5,8.5) P44(21.5,8.5) R1(-21.5,7.5) R2(-20.5,7.5) R3(-19.5,7.5) R4(-18.5,7.5) R5(-17.5,7.5) R6(-16.5,7.5) R7(-15.5,7.5) R8(-14.5,7.5) R9(-13.5,7.5) R10(-12.5,7.5) R11(-11.5,7.5) R12(-10.5,7.5) R13(-9.5,7.5) R14(-8.5,7.5) R15(-7.5,7.5) R16(-6.5,7.5) R17(-5.5,7.5) R18(-4.5,7.5) R19(-3.5,7.5) R20(-2.5,7.5) R21(-1.5,7.5) R22(-0.5,7.5) R23(0.5,7.5) R24(1.5,7.5) R25(2.5,7.5) R26(3.5,7.5) R27(4.5,7.5) R28(5.5,7.5) R29(6.5,7.5) R30(7.5,7.5) R31(8.5,7.5) R32(9.5,7.5) R33(10.5,7.5) R34(11.5,7.5) R35(12.5,7.5) R36(13.5,7.5) R37(14.5,7.5) R38(15.5,7.5) R39(16.5,7.5) R40(17.5,7.5) R41(18.5,7.5) R42(19.5,7.5) R43(20.5,7.5) R44(21.5,7.5) T1(-21.5,6.5) T2(-20.5,6.5) T3(-19.5,6.5) T4(-18.5,6.5) T5(-17.5,6.5) T6(-16.5,6.5) T7(-15.5,6.5) T8(-14.5,6.5) T9(-13.5,6.5) T10(-12.5,6.5) T11(-11.5,6.5) T12(-10.5,6.5) T13(-9.5,6.5) T14(-8.5,6.5) T15(-7.5,6.5) T16(-6.5,6.5) T17(-5.5,6.5) T18(-4.5,6.5) T19(-3.5,6.5) T20(-2.5,6.5) T21(-1.5,6.5) T22(-0.5,6.5) T23(0.5,6.5) T24(1.5,6.5) T25(2.5,6.5) T26(3.5,6.5) T27(4.5,6.5) T28(5.5,6.5) T29(6.5,6.5) T30(7.5,6.5) T31(8.5,6.5) T32(9.5,6.5) T33(10.5,6.5) T34(11.5,6.5) T35(12.5,6.5) T36(13.5,6.5) T37(14.5,6.5) T38(15.5,6.5) T39(16.5,6.5) T40(17.5,6.5) T41(18.5,6.5) T42(19.5,6.5) T43(20.5,6.5) T44(21.5,6.5) U1(-21.5,5.5) U2(-20.5,5.5) U3(-19.5,5.5) U4(-18.5,5.5) U5(-17.5,5.5) U6(-16.5,5.5) U7(-15.5,5.5) U8(-14.5,5.5) U9(-13.5,5.5) U10(-12.5,5.5) U11(-11.5,5.5) U12(-10.5,5.5) U13(-9.5,5.5) U14(-8.5,5.5) U15(-7.5,5.5) U16(-6.5,5.5) U17(-5.5,5.5) U18(-4.5,5.5) U19(-3.5,5.5) U20(-2.5,5.5) U21(-1.5,5.5) U22(-0.5,5.5) U23(0.5,5.5) U24(1.5,5.5) U25(2.5,5.5) U26(3.5,5.5) U27(4.5,5.5) U28(5.5,5.5) U29(6.5,5.5) U30(7.5,5.5) U31(8.5,5.5) U32(9.5,5.5) U33(10.5,5.5) U34(11.5,5.5) U35(12.5,5.5) U36(13.5,5.5) U37(14.5,5.5) U38(15.5,5.5) U39(16.5,5.5) U40(17.5,5.5) U41(18.5,5.5) U42(19.5,5.5) U43(20.5,5.5) U44(21.5,5.5) V1(-21.5,4.5) V2(-20.5,4.5) V3(-19.5,4.5) V4(-18.5,4.5) V5(-17.5,4.5) V6(-16.5,4.5) V7(-15.5,4.5) V8(-14.5,4.5) V9(-13.5,4.5) V10(-12.5,4.5) V11(-11.5,4.5) V12(-10.5,4.5) V13(-9.5,4.5) V14(-8.5,4.5) V15(-7.5,4.5) V16(-6.5,4.5) V17(-5.5,4.5) V18(-4.5,4.5) V19(-3.5,4.5) V20(-2.5,4.5) V21(-1.5,4.5) V22(-0.5,4.5) V23(0.5,4.5) V24(1.5,4.5) V25(2.5,4.5) V26(3.5,4.5) V27(4.5,4.5) V28(5.5,4.5) V29(6.5,4.5) V30(7.5,4.5) V31(8.5,4.5) V32(9.5,4.5) V33(10.5,4.5) V34(11.5,4.5) V35(12.5,4.5) V36(13.5,4.5) V37(14.5,4.5) V38(15.5,4.5) V39(16.5,4.5) V40(17.5,4.5) V41(18.5,4.5) V42(19.5,4.5) V43(20.5,4.5) V44(21.5,4.5) W1(-21.5,3.5) W2(-20.5,3.5) W3(-19.5,3.5) W4(-18.5,3.5) W5(-17.5,3.5) W6(-16.5,3.5) W7(-15.5,3.5) W8(-14.5,3.5) W9(-13.5,3.5) W10(-12.5,3.5) W11(-11.5,3.5) W12(-10.5,3.5) W13(-9.5,3.5) W14(-8.5,3.5) W15(-7.5,3.5) W16(-6.5,3.5) W17(-5.5,3.5) W18(-4.5,3.5) W19(-3.5,3.5) W20(-2.5,3.5) W21(-1.5,3.5) W22(-0.5,3.5) W23(0.5,3.5) W24(1.5,3.5) W25(2.5,3.5) W26(3.5,3.5) W27(4.5,3.5) W28(5.5,3.5) W29(6.5,3.5) W30(7.5,3.5) W31(8.5,3.5) W32(9.5,3.5) W33(10.5,3.5) W34(11.5,3.5) W35(12.5,3.5) W36(13.5,3.5) W37(14.5,3.5) W38(15.5,3.5) W39(16.5,3.5) W40(17.5,3.5) W41(18.5,3.5) W42(19.5,3.5) W43(20.5,3.5) W44(21.5,3.5) Y1(-21.5,2.5) Y2(-20.5,2.5) Y3(-19.5,2.5) Y4(-18.5,2.5) Y5(-17.5,2.5) Y6(-16.5,2.5) Y7(-15.5,2.5) Y8(-14.5,2.5) Y9(-13.5,2.5) Y10(-12.5,2.5) Y11(-11.5,2.5) Y12(-10.5,2.5) Y13(-9.5,2.5) Y14(-8.5,2.5) Y15(-7.5,2.5) Y16(-6.5,2.5) Y17(-5.5,2.5) Y18(-4.5,2.5) Y19(-3.5,2.5) Y20(-2.5,2.5) Y21(-1.5,2.5) Y22(-0.5,2.5) Y23(0.5,2.5) Y24(1.5,2.5) Y25(2.5,2.5) Y26(3.5,2.5) Y27(4.5,2.5) Y28(5.5,2.5) Y29(6.5,2.5) Y30(7.5,2.5) Y31(8.5,2.5) Y32(9.5,2.5) Y33(10.5,2.5) Y34(11.5,2.5) Y35(12.5,2.5) Y36(13.5,2.5) Y37(14.5,2.5) Y38(15.5,2.5) Y39(16.5,2.5) Y40(17.5,2.5) Y41(18.5,2.5) Y42(19.5,2.5) Y43(20.5,2.5) Y44(21.5,2.5)
  silkscreen extent -37,-37 37,37
Oscillator_SMD_SiT_PQFN-4Pin_3.2x2.5mm [mm]
  rrect50% 1.4x1.2 smd mask+0: 1(-1.1,-0.924) 2(1.1,-0.924) 3(1.1,0.924) 4(-1.1,0.924)
  silkscreen extent -2.76,-1.92 1.8,1.5
"RES 1206_3216" [mm] "Chip Resistor, 2-Leads, Body 3.13x1.55mm, IPC Medium Density"
  rect 1.2x1.65 smd: 1(-1.4,0) 2(1.4,0)
  silkscreen extent -2.3,-1.1 2.3,1.1, body extent -1.6,-0.8 1.6,0.8, height 0.6
S25Fl127_SOIC_8 [mm] "SOIC, 8-Leads"
  oval 1.7x0.6 smd: 1(-3.575,1.905) 2(-3.575,0.635) 3(-3.575,-0.635) 4(-3.575,-1.905) 5(3.575,-1.905) 6(3.575,-0.635) 7(3.575,0.635) 8(3.575,1.905)
  silkscreen extent -3.7,-2.75 2.33,2.88, body extent -2.75,-2.75 2.75,2.75, height 0.05
SMB_V-RJ45 [mm] "Connector; SMB Straight"
  round 2.5 hole 1.5: 1(0,0) 2(-2.5,2.5) 2(-2.5,-2.5) 2(2.5,2.5) 2(2.5,-2.5)
  silkscreen extent -3.15,-3.15 3.15,3.15
SW_DIP-1 [mm] "DIP; 4 Leads; Row Spacing 7.62 mm; Pitch 2.54 mm"
  rect 1.5x1.5 hole 1: 1(-3.81,0)
  round 1.5 hole 1: 2(3.81,0)
  silkscreen extent -5.53,-1.3 4.95,1.62
SW_DIP_SPSTx04_Slide [mm] "6.7x11.72mm_W8.61mm_P2.54mm_LowProfile"
  rect 2.44x1.12 smd: 1(-4.305,3.81) 2(-4.305,1.27) 3(-4.305,-1.27) 4(-4.305,-3.81) 5(4.305,-3.81) 6(4.305,-1.27) 7(4.305,1.27) 8(4.305,3.81)
  silkscreen extent -5.81,-6.29 5.8,6.11
"SWITCH TACTILE" [mm]
  rect 1.9x1.9 hole 1: 1(2.25,3.25) 2(2.25,-3.25) 3(-2.25,-3.25) 4(-2.25,3.25)
  silkscreen extent -3,-3 3,3, body extent -3,-4 2.99,3.8, height 5.11
TXB0104PWR [mm] "4-Bit Bidirectional Voltage-Level Shifter with Auto Direction Sensing   TSSOP-14"
  rect 0.3x1.6 smd: A1(-1.3,-2.85) A2(-0.65,-2.85) A3(0,-2.85) A4(0.65,-2.85) B1(-1.3,2.85) B2(-0.65,2.85) B3(0,2.85) B4(0.65,2.85) GND(1.95,-2.85) N.C(1.3,-2.85) N.C(1.3,2.85) OE(1.95,2.85) VCCA(-1.95,-2.85) VCCB(-1.95,2.85)
  silkscreen extent -2.77,-2.98 2.5,1.65, body extent -2.45,-1.91 2.63,1.9, height 2.65
TXB0108PWR [mm] "8-Bit Bidirectional Voltage-Level Shifter with Auto Direction Sensing"
  oval 1.4x0.45 smd: A1(-2.95,2.925) A2(-2.95,1.625) A3(-2.95,0.975) A4(-2.95,0.325) A5(-2.95,-0.325) A6(-2.95,-0.975) A7(-2.95,-1.625) A8(-2.95,-2.275) B1(2.95,2.925) B2(2.95,1.625) B3(2.95,0.975) B4(2.95,0.325) B5(2.95,-0.325) B6(2.95,-0.975) B7(2.95,-1.625) B8(2.95,-2.275) GND(2.95,-2.925) OE(-2.95,-2.925) VCCA(-2.95,2.275) VCCB(2.95,2.275)
  silkscreen extent -3.07,-3.3 1.85,3.82, body extent -2.25,-3.3 2.25,3.3, height 1.2